# Altium PCB PCB_adjivas.PcbDoc (part 1 of 2)
Units mm, origin at the board's own origin, x right, y up, seen from the top; angles counter-clockwise.
Board outline 105 x 80 mm, 8 copper layers (Top Side (Sig 1), Ground Plane 1 (GND), Signal Layer 2, Power Plane 1 (VCC), Power Plane 2 (VCC), Signal Layer 3, Ground Plane 2 (GND), Bottom Side (Sig 4)), stack 1.607 mm thick; 259 components, 308 nets, 1263 pads, 294 vias.
Unrouted connection lines stored in the file: 787.
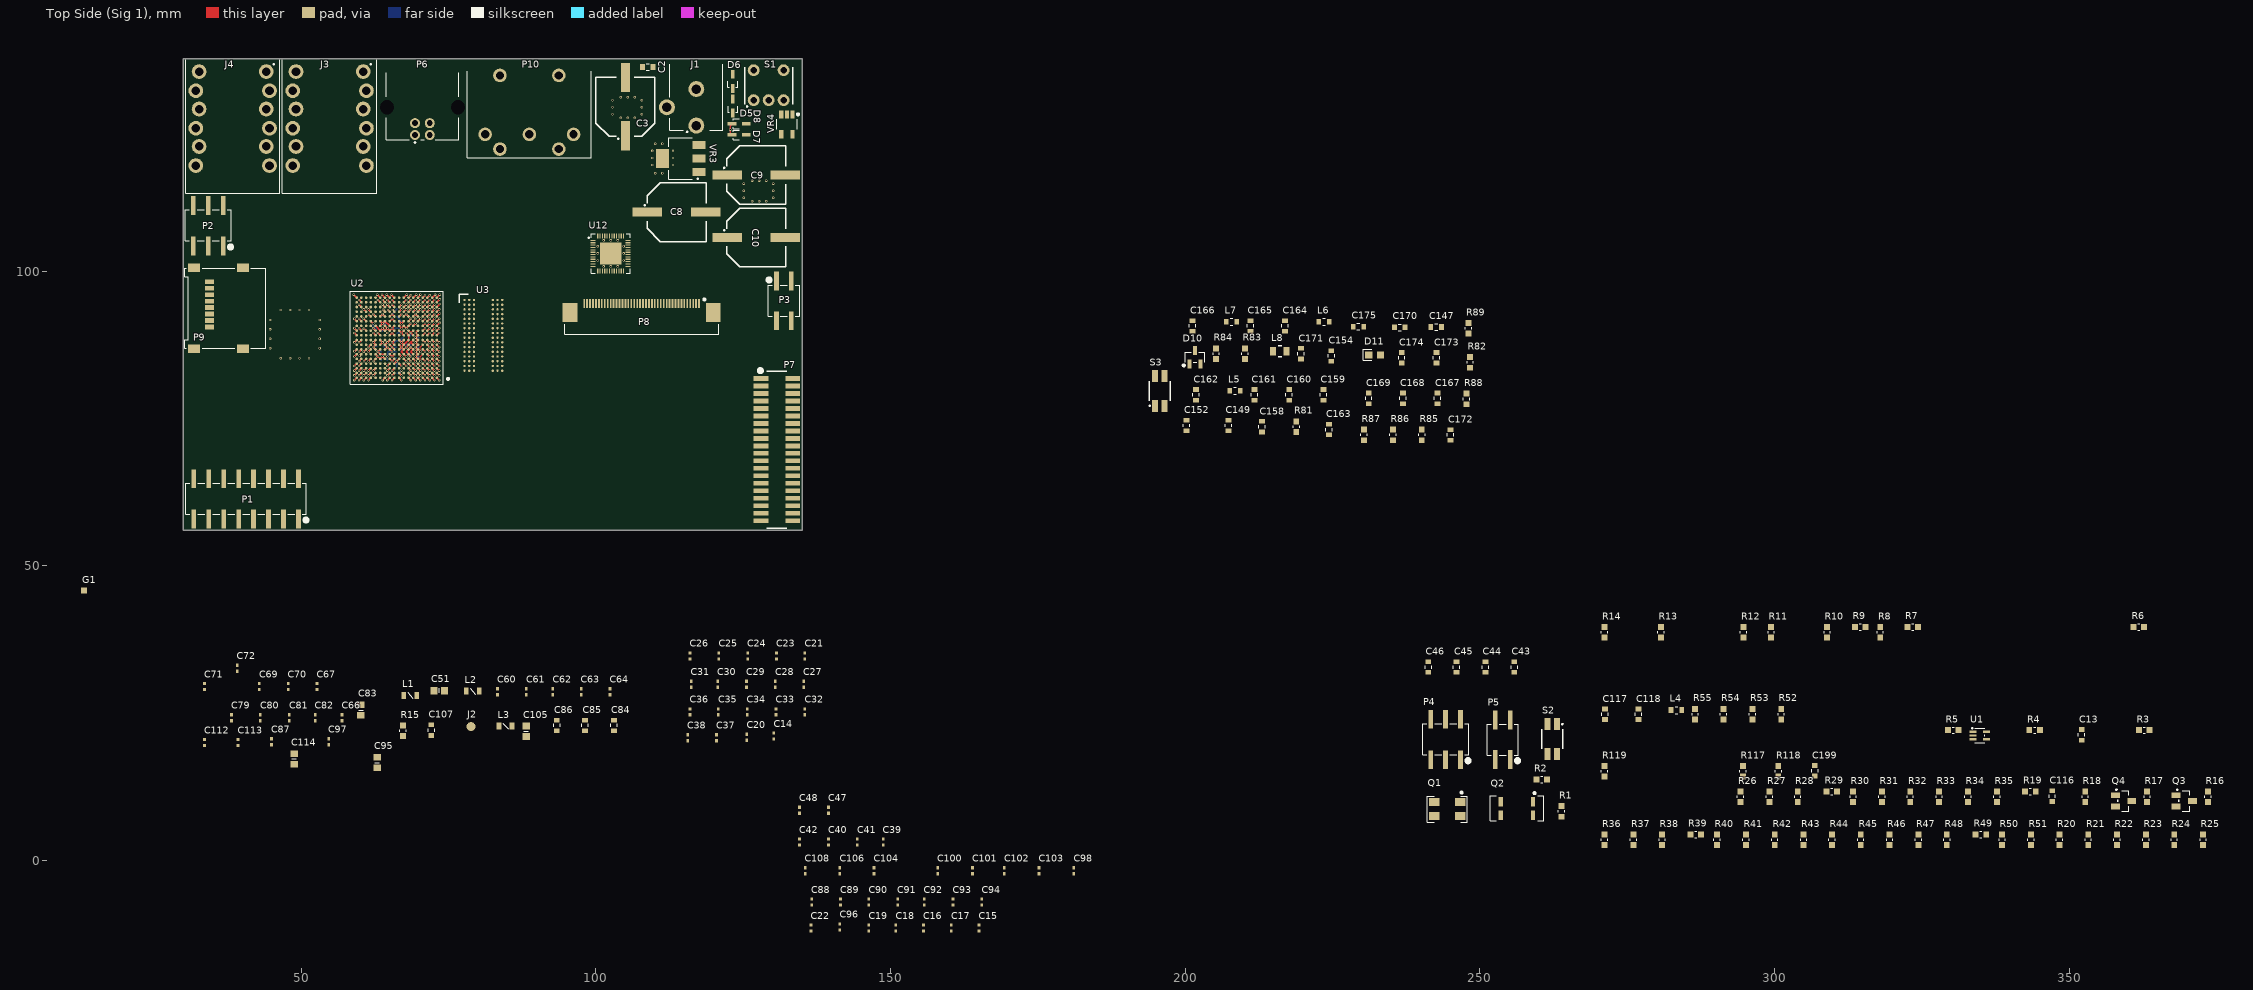
[diagram p0: Top Side (Sig 1) view]
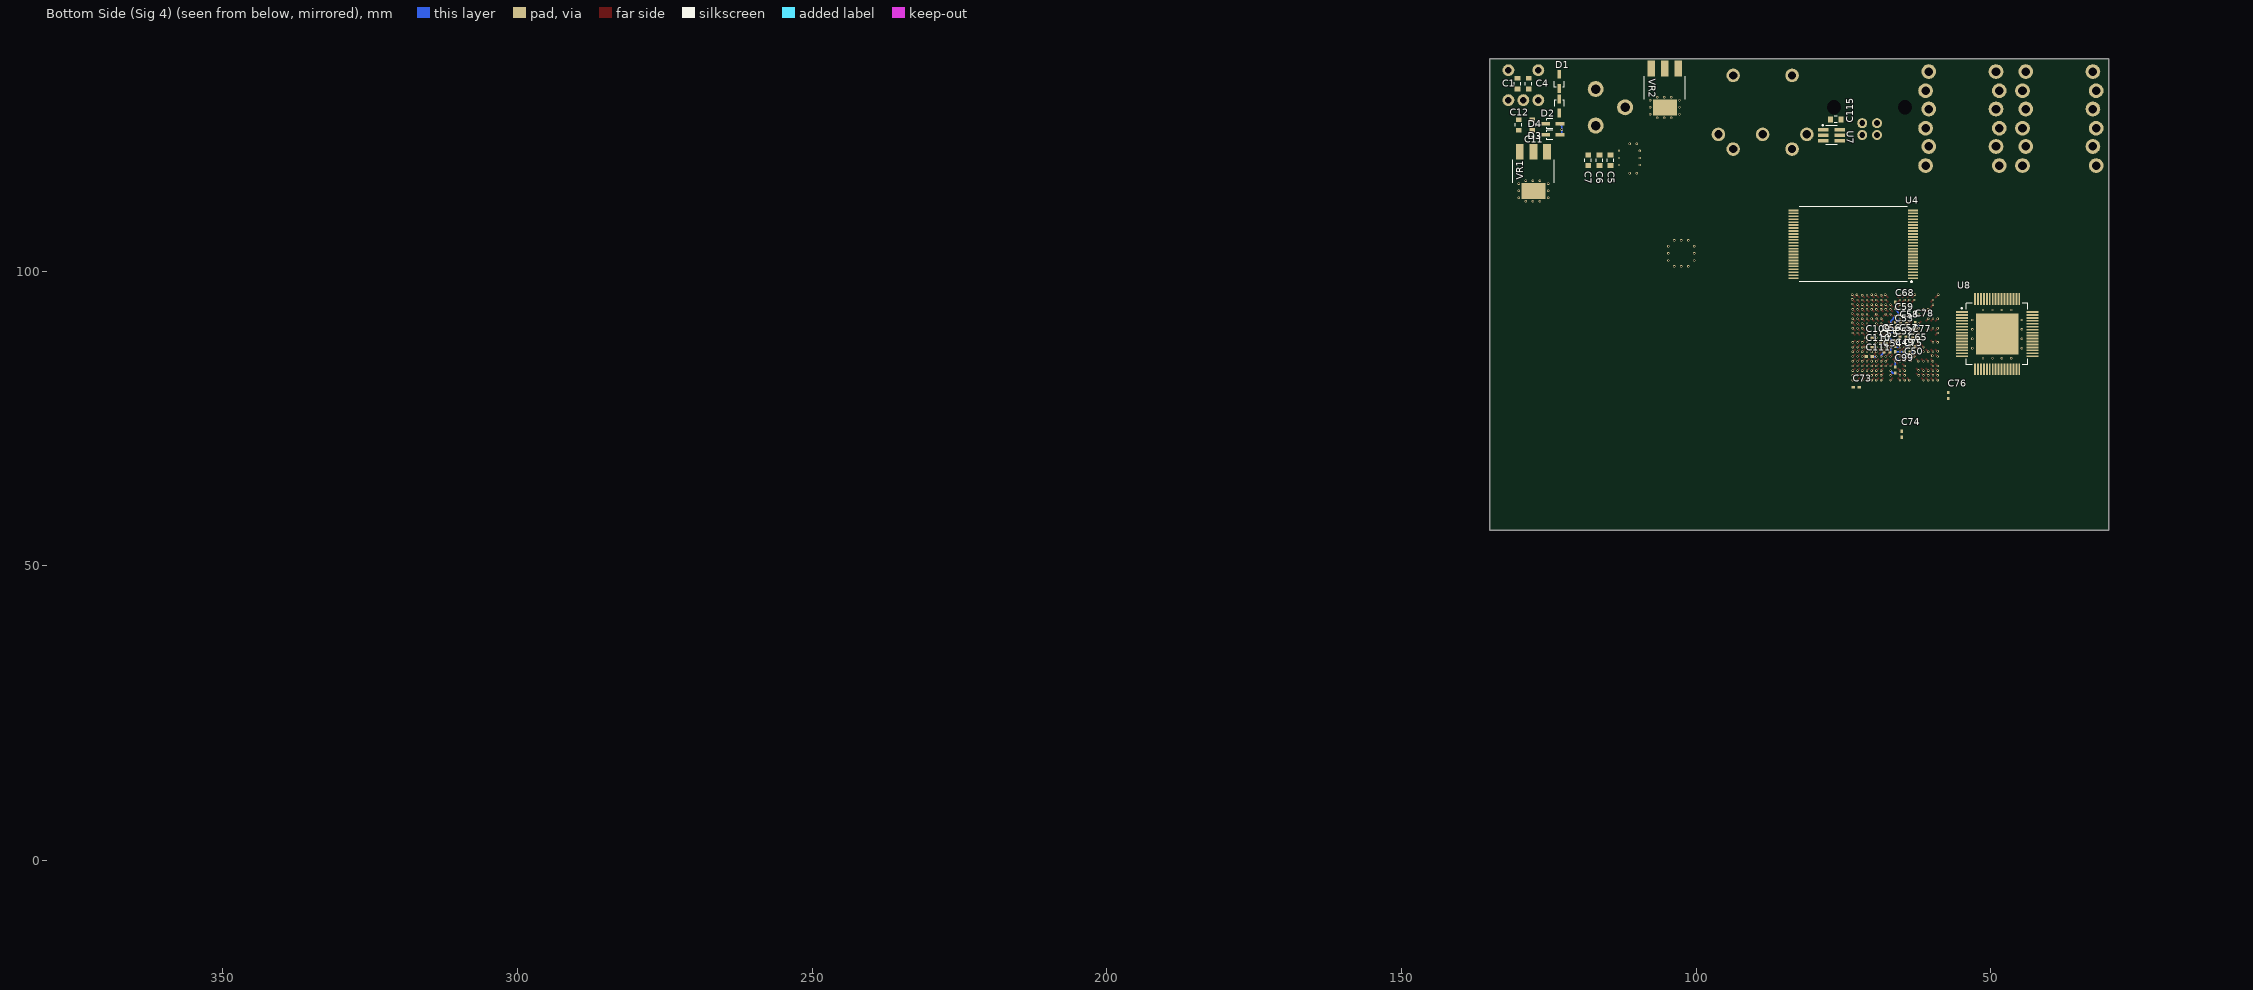
[diagram p1: Bottom Side (Sig 4) view, seen from below]
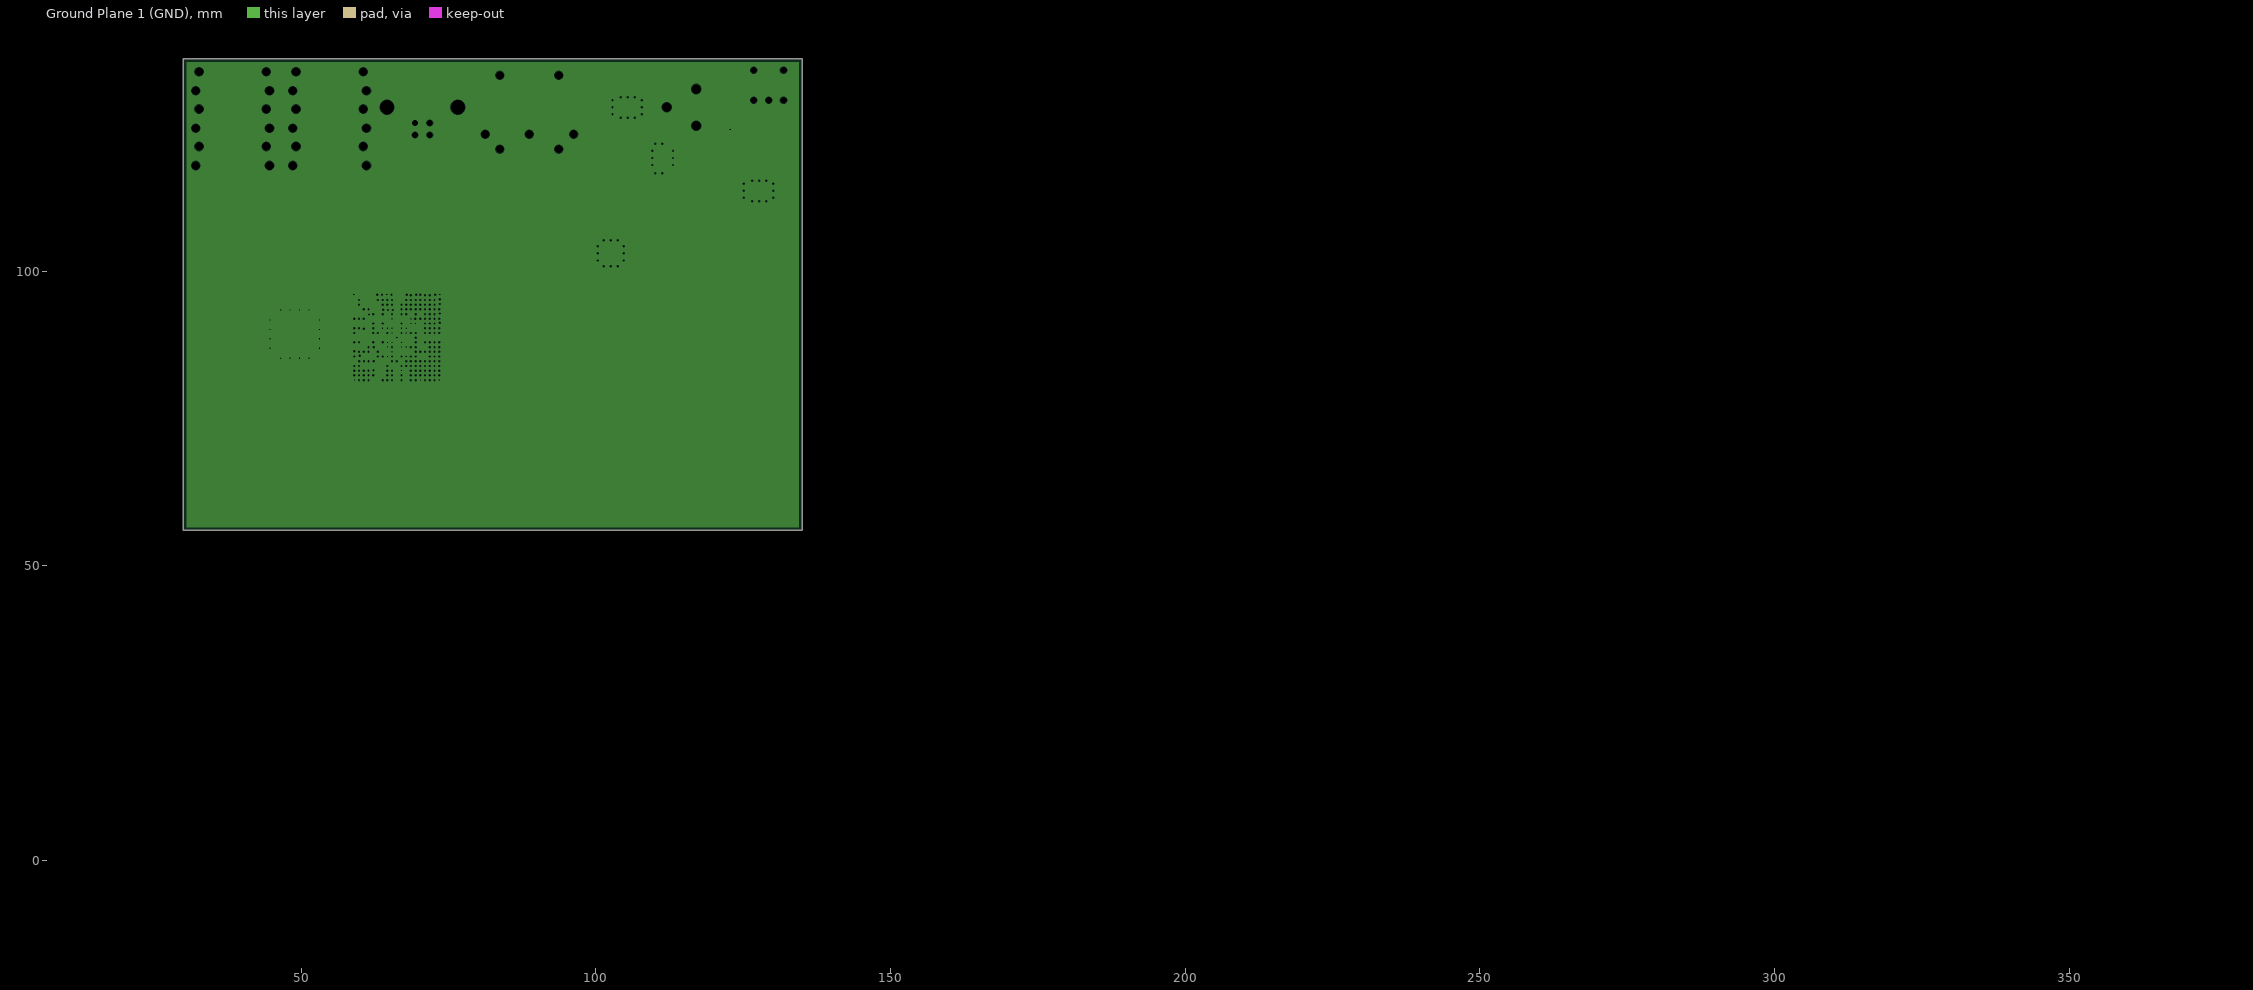
[diagram p2: Ground Plane 1 (GND), clearances drawn from the general rule]
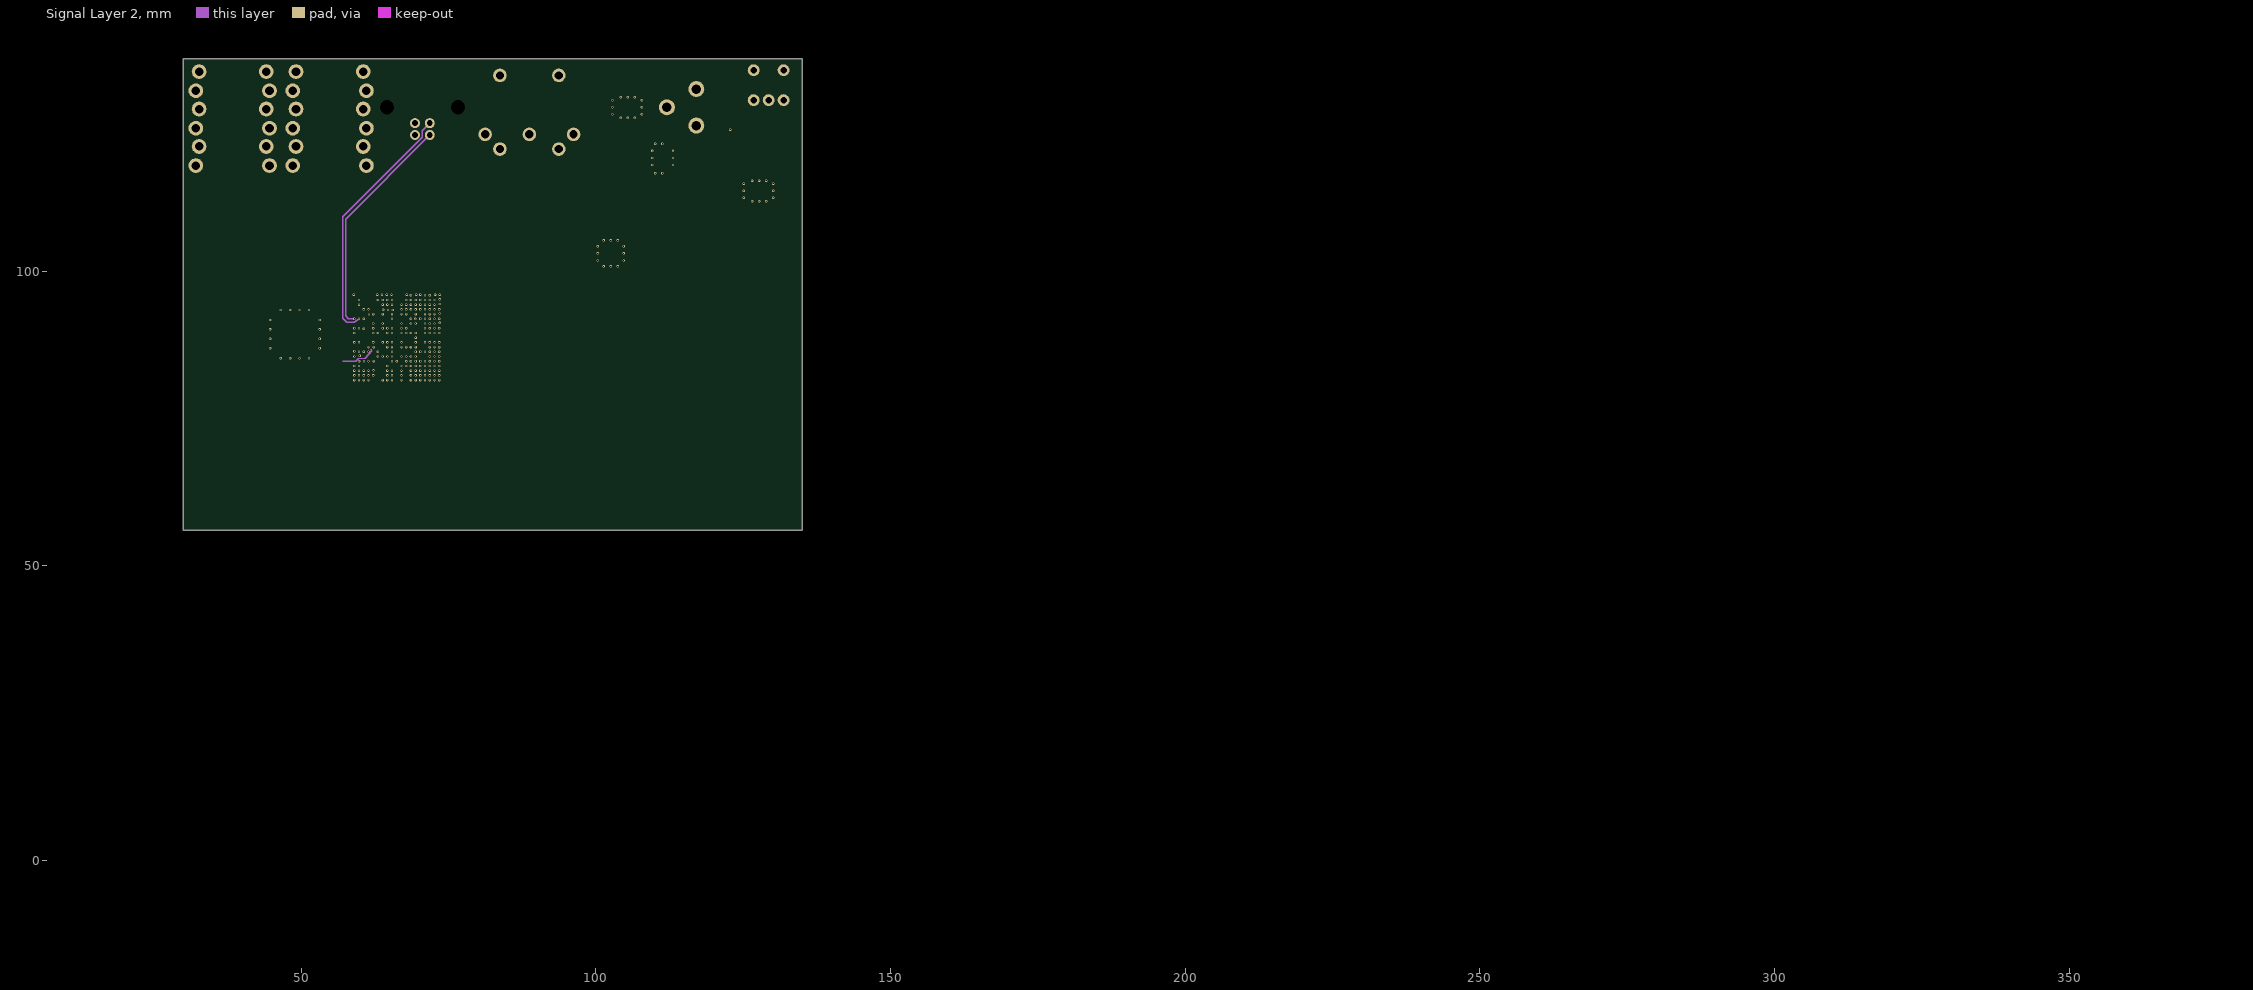
[diagram p3: Signal Layer 2]
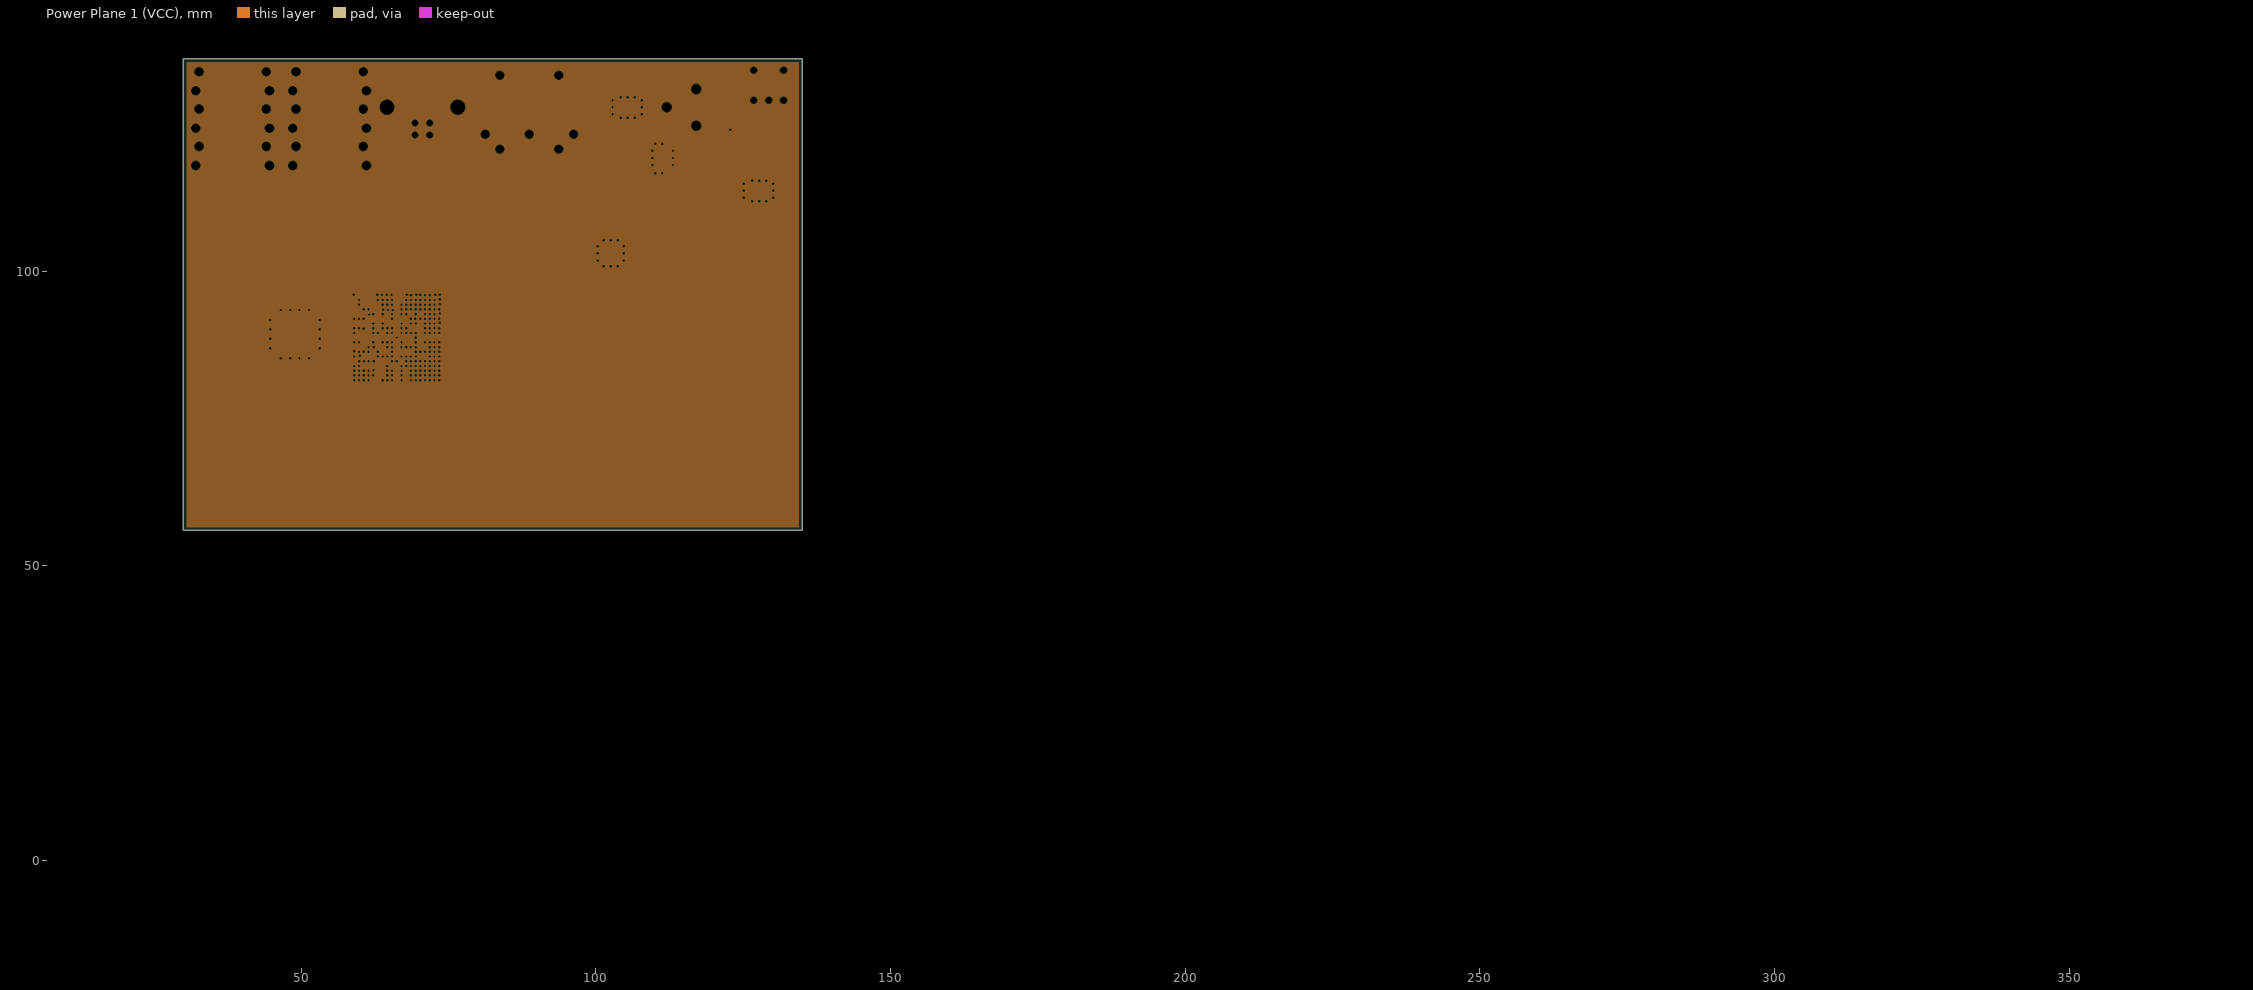
[diagram p4: Power Plane 1 (VCC), clearances drawn from the general rule]
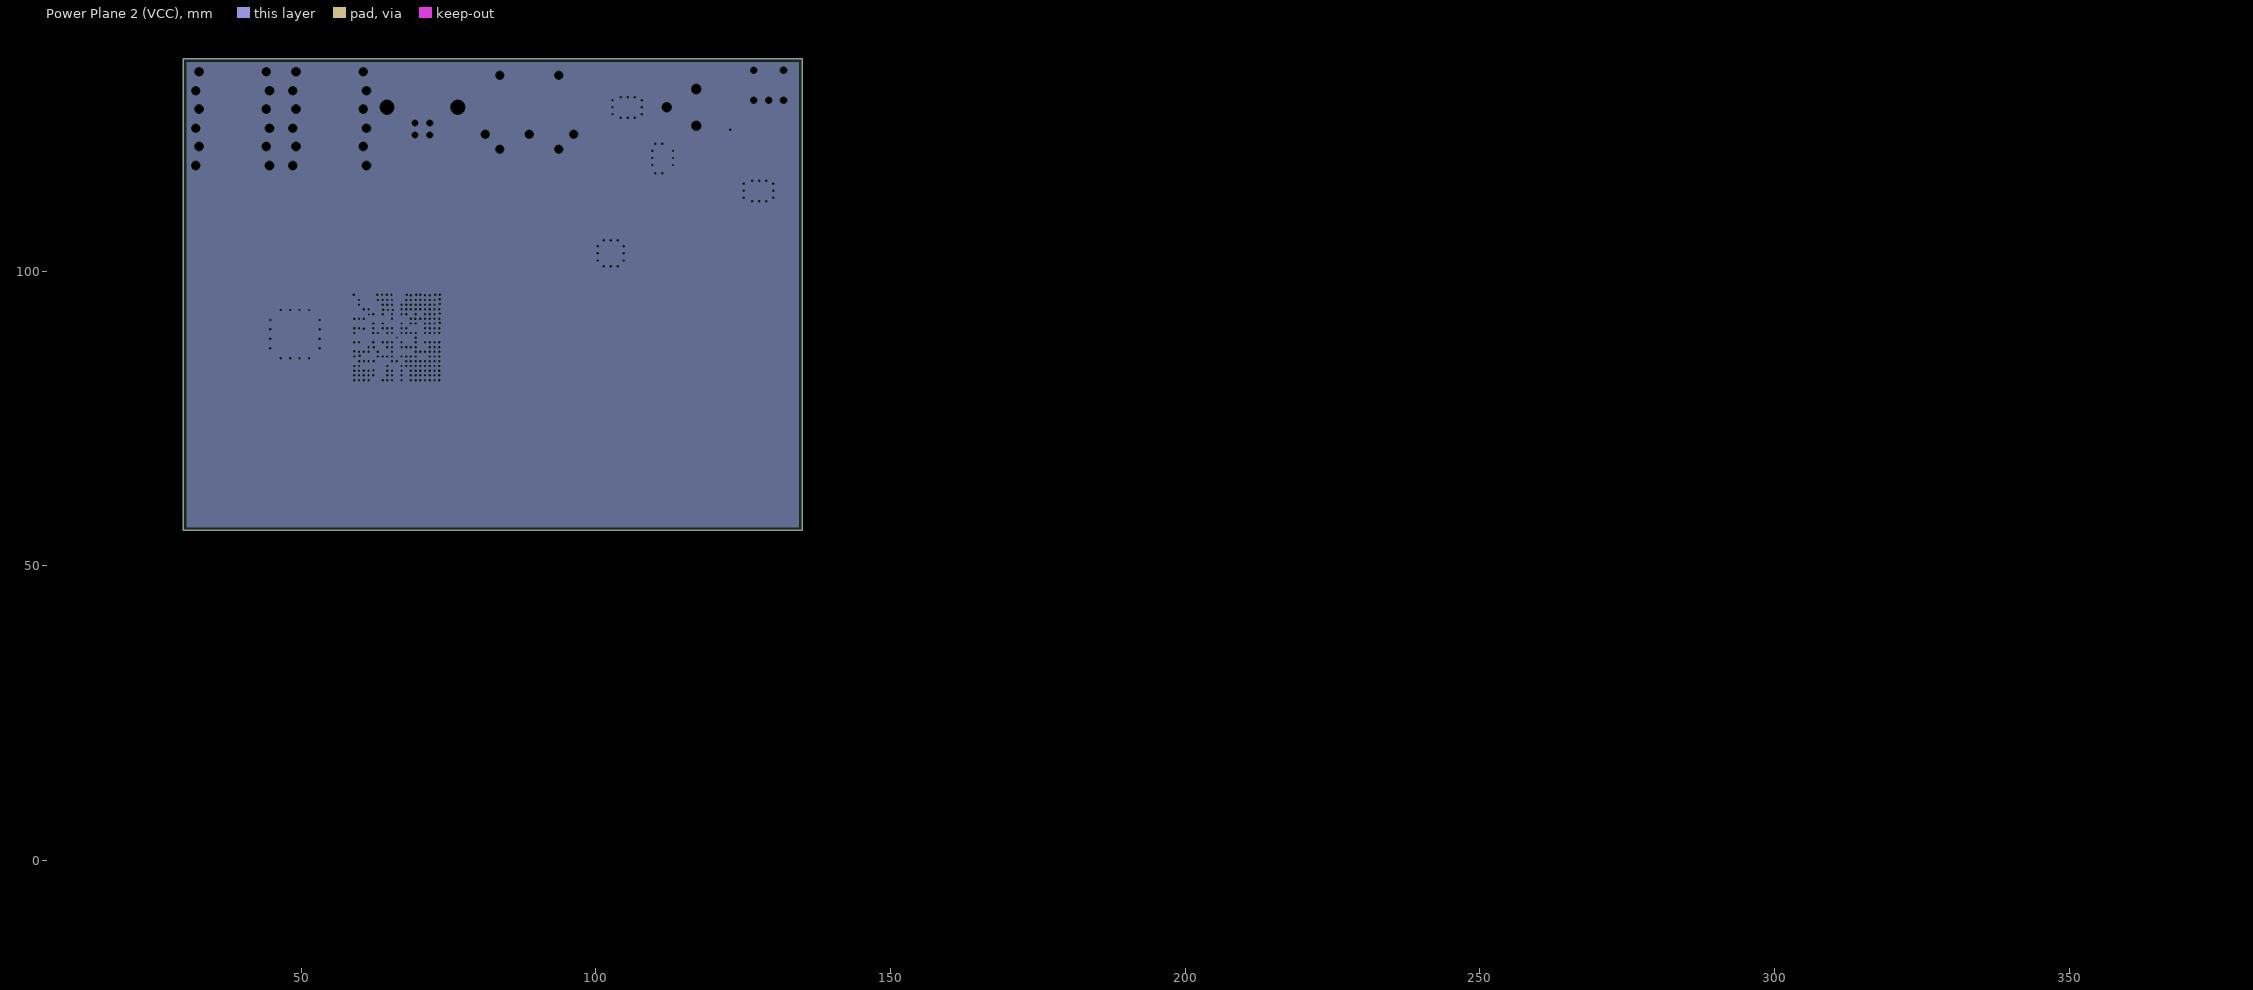
[diagram p5: Power Plane 2 (VCC), clearances drawn from the general rule]
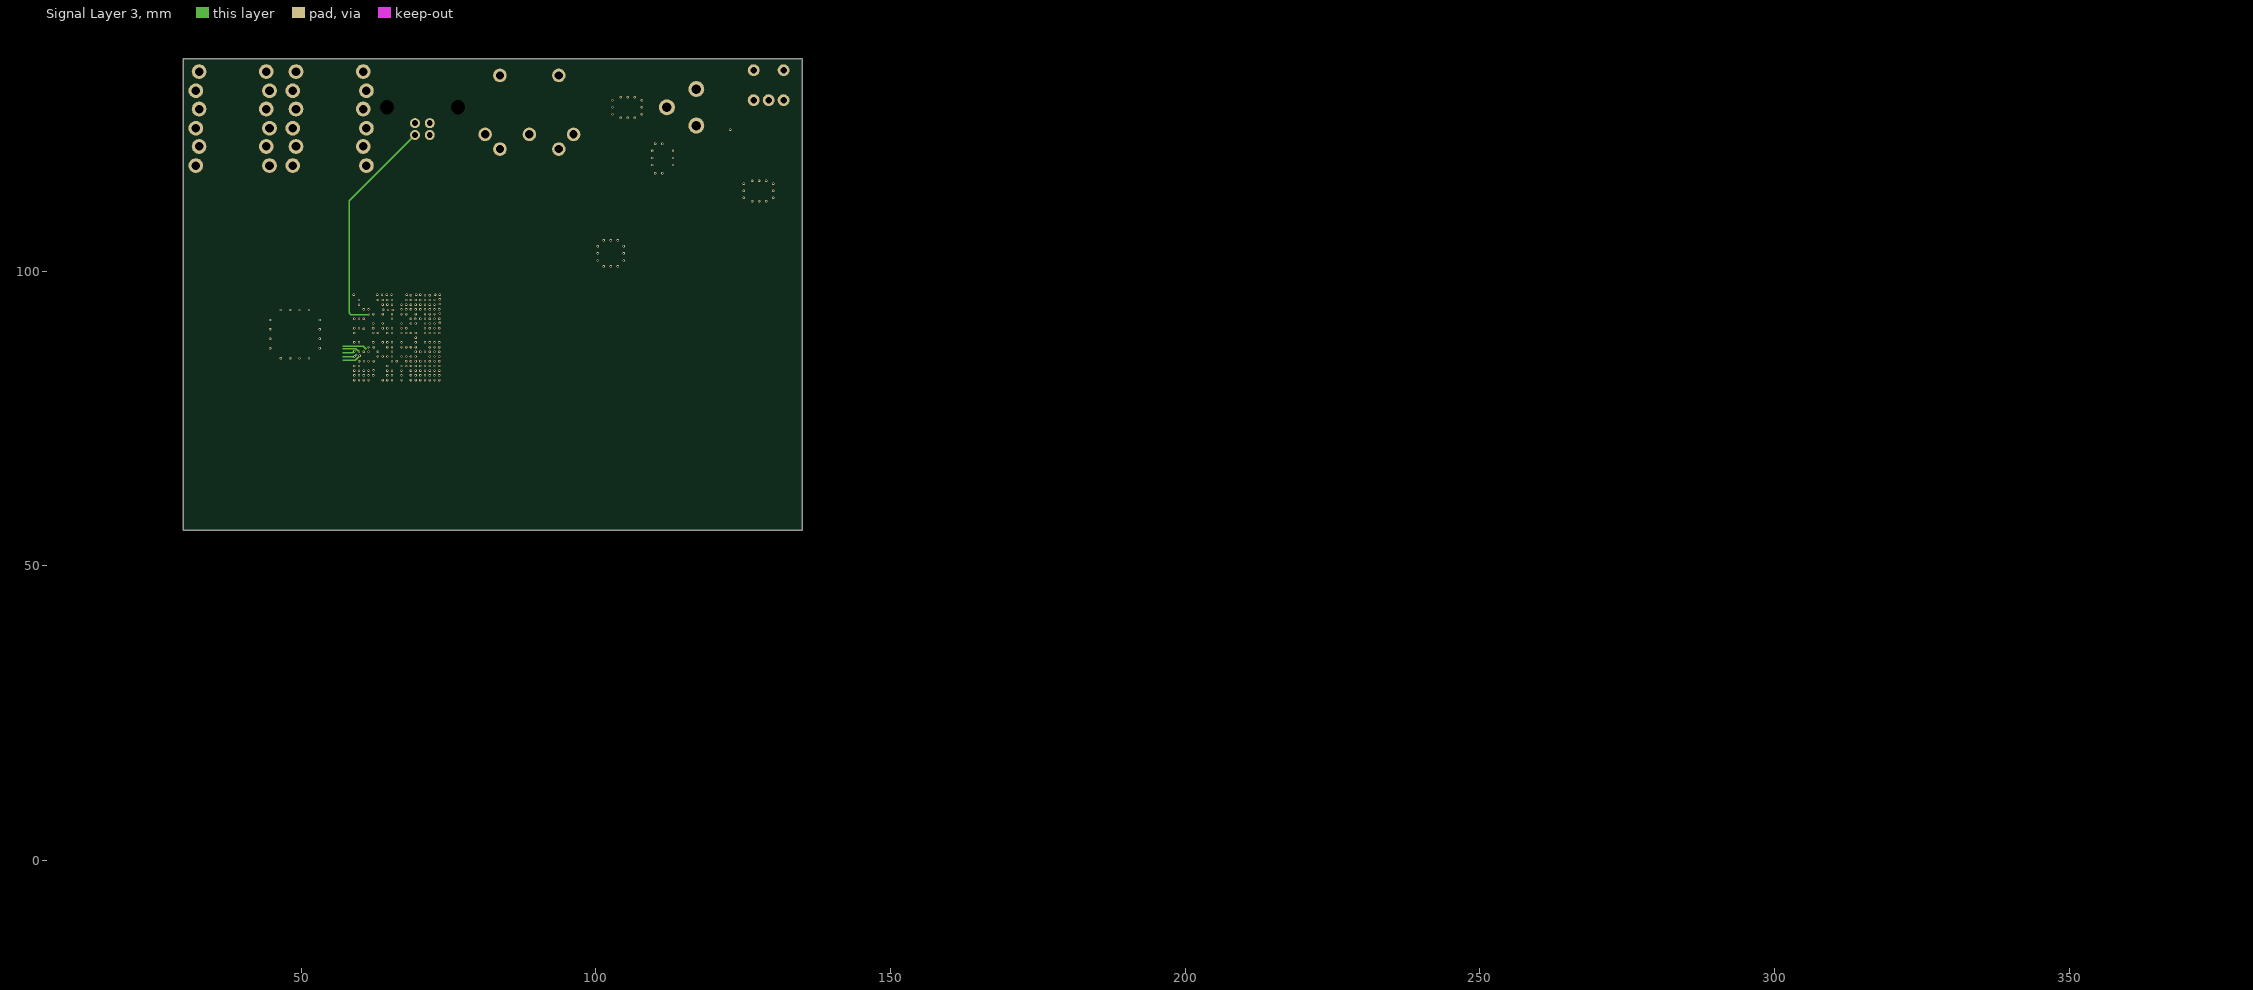
[diagram p6: Signal Layer 3]
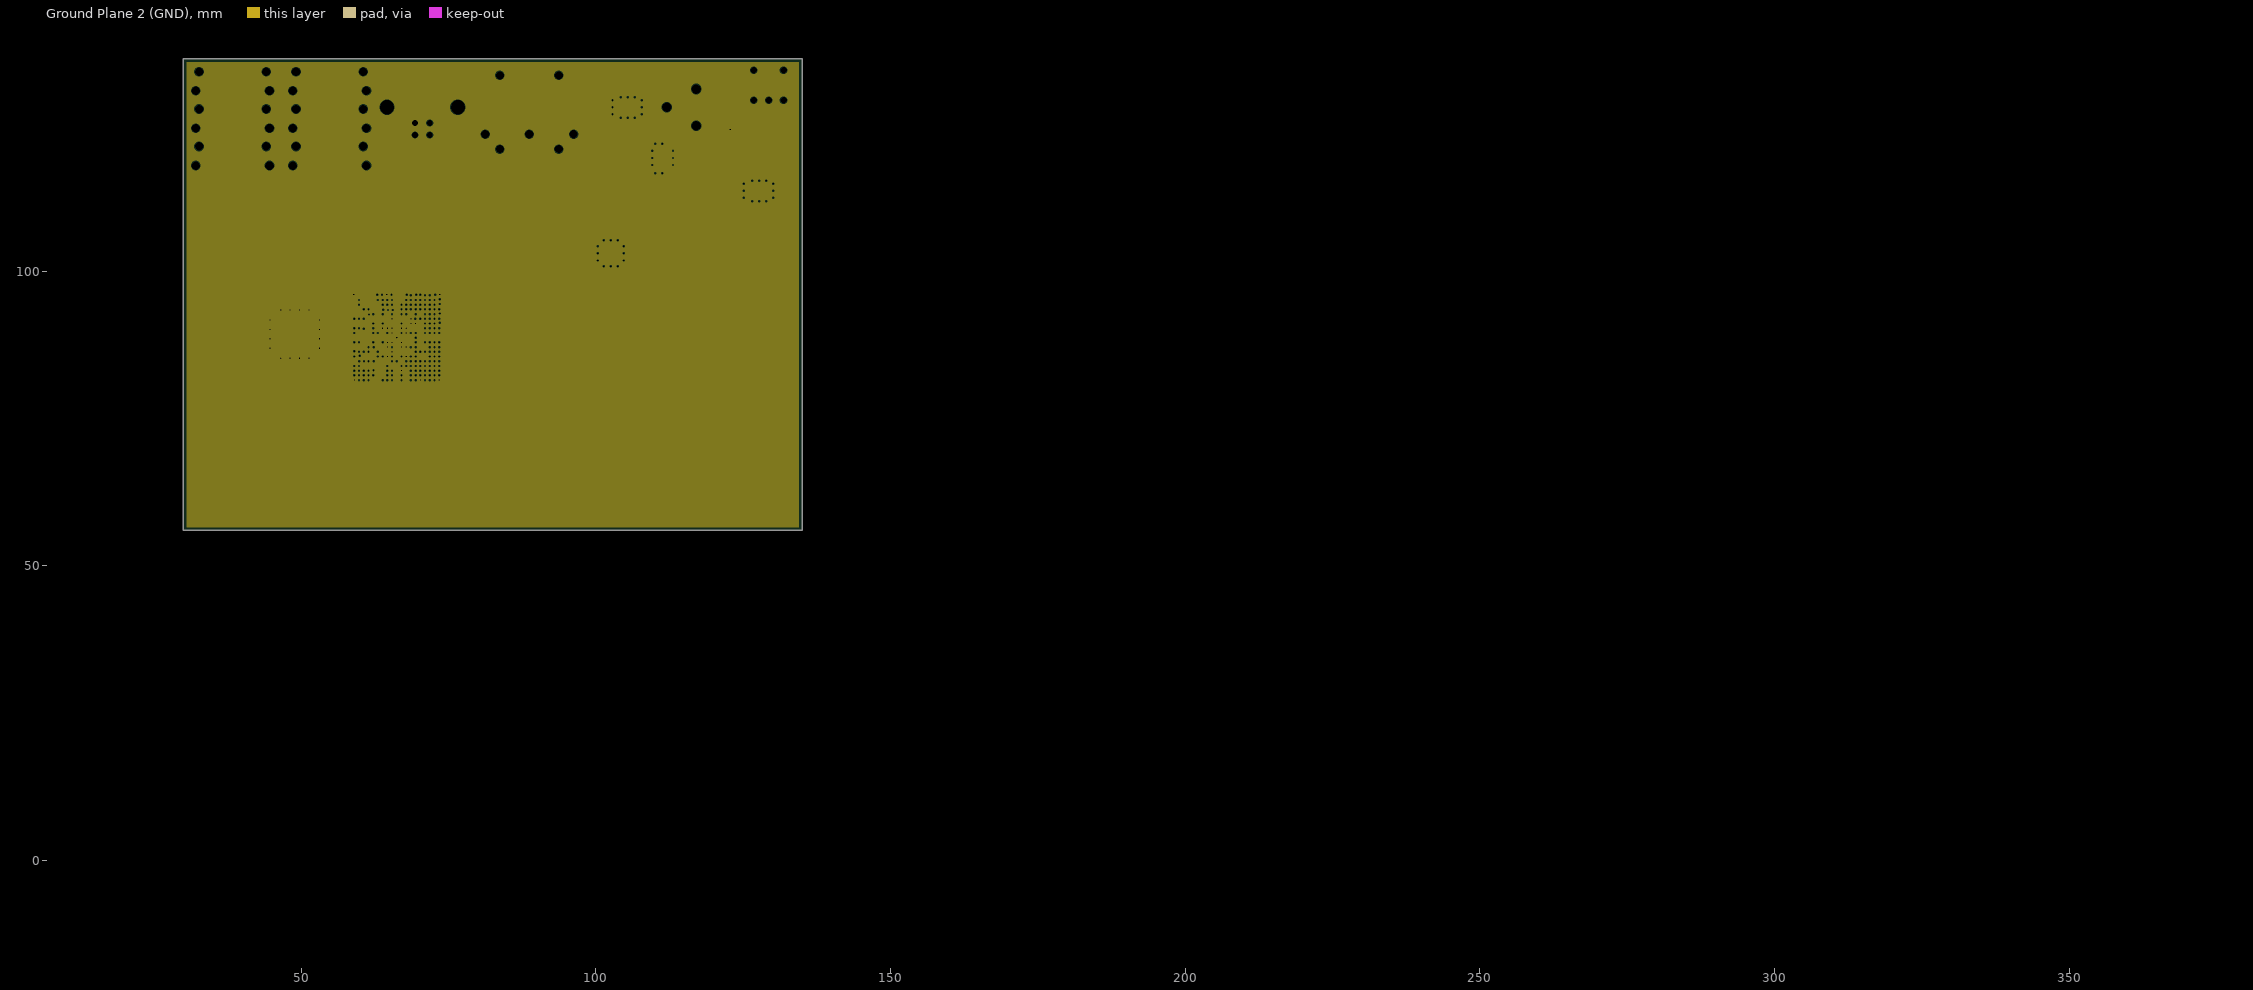
[diagram p7: Ground Plane 2 (GND), clearances drawn from the general rule]

## Layer stack, top to bottom
Top Solder: solder mask 0.0102, Solder Resist, Dk 3.7
Top Side (Sig 1): signal copper 0.035
Dielectric 1: prepreg 0.2, FR-4, Dk 4.6
Ground Plane 1 (GND): plane copper 0.035, net GND
Dielectric 2: core 0.2, FR-4, Dk 4.6
Signal Layer 2: signal copper 0.035
Dielectric 3: prepreg 0.2, FR-4, Dk 4.6
Power Plane 1 (VCC): plane copper 0.035
Dielectric 4: core 0.2, FR-4, Dk 4.6
Power Plane 2 (VCC): plane copper 0.035
Dielectric 5: prepreg 0.2, FR-4, Dk 4.6
Signal Layer 3: signal copper 0.035
Dielectric 6: core 0.2, FR-4, Dk 4.6
Ground Plane 2 (GND): plane copper 0.035, net GND
Dielectric 7: prepreg 0.127, FR-4, Dk 4.2
Bottom Side (Sig 4): signal copper 0.035
Bottom Solder: solder mask 0.0102, Solder Resist, Dk 3.7

## Board outline
30,56 30,136 135,136 135,56

## Design rules (kind name [scope] priority, off if disabled: settings)
Clearance [All] p1: gap=0.1
Height [All] p1: minheight=0 maxheight=50 prefheight=12.7
HoleSize [All] p1: absolutevalues=TRUE maxlimit=10 minlimit=0.2 maxpercent=80.000 minpercent=20.000
HoleToHoleClearance [All] p1: gap=0.25 allowstackedmicrovias=TRUE
MinimumSolderMaskSliver [All] p1: minsoldermaskwidth=0.1
PlaneClearance [All] p1: clearance=0.1
PlaneConnect [All] p1: planeconnectstyle=Relief reliefexpansion=0.1 reliefentries=4 reliefconductorwidth=0.1 reliefairgap=0.1
PolygonConnect [All] p1: connectstyle=Relief reliefconductorwidth=0.1 reliefentries=4 polygonreliefangle="90 Angle" airgapwidth=0.1
RoutingVias [All] p1: holewidth=0.2 width=0.4 viastyle="Through Hole" minholewidth=0.2 minwidth=0.4 maxholewidth=10 maxwidth=11
ShortCircuit "GND-AGND Connection" [InNet('GND') vs InNet('AGND')] p1: allowed=TRUE
SilkToSilkClearance SilkToSilkClearance_1 [OnLayer('Top Overlay') vs OnLayer('Top Overlay')] p1: silktosilkclearance=0
SilkToSilkClearance [All] p2: silktosilkclearance=0
SilkToSolderMaskClearance [IsPad] p1: minsilkscreentomaskgap=0.15 clearancetoexposedcopper=TRUE
SolderMaskExpansion [All] p1: expansion=0.05
UnpouredPolygon [All] p1: allowunpoured=FALSE
Width [All] p1: maxlimit=10 minlimit=0.1 preferedwidth=0.25
20 further rules are at their usual default settings.

## Classes and differential pairs
component class Alimentation: C1 C2 C3 C4 C5 C6 C7 C8 C9 C10 C11 C12 D1 D2 D3 D4 D5 D6 D7 D8 G1 J1 S1 VR1 VR2 VR3 VR4
channel class PC2_Input: E V X Z
net class LCD_R[0..7]: LCD_R0 LCD_R1 LCD_R2 LCD_R3 LCD_R4 LCD_R5 LCD_R6 LCD_R7
net class LCD_G[0..7]: LCD_G0 LCD_G1 LCD_G2 LCD_G3 LCD_G4 LCD_G5 LCD_G6 LCD_G7
net class LCD_B[0..7]: LCD_B0 LCD_B1 LCD_B2 LCD_B3 LCD_B4 LCD_B5 LCD_B6 LCD_B7
component class USB: C115 P6 U7
component class PMIC: C158 C159 C160 C161 C162 C163 C164 C165 C166 C167 C168 C169 C170 C171 C172 C173 C174 C175 D10 D11 L5 L6 L7 L8 R81 R82 R83 R84 R85 R86 R87 R88 R89 S3 U12
component class "Part C (Alim)": C49 C50 C51 C52 C53 C54 C55 C56 C57 C58 C59 C60 C61 C62 C63 C64 C65 C66 C67 C68 C69 C70 C71 C72 C73 C74 C75 C76 C77 C78 C79 C80 C81 C82 C83 C84 C85 C86 C87 C88 C89 C90 C91 C92 C93 C94 C95 C96 C97 C98 C99 C100 C101 C102 C103 C104 C105 C106 C107 C108 C109 C110 C111 C112 C113 C114 J2 L1 L2 L3 R15
component class "Part B": C43 C44 C45 C46 C47 C48 P5
component class "Part A": C13 C14 C15 C16 C17 C18 C19 C20 C21 C22 C23 C24 C25 C26 C27 C28 C29 C30 C31 C32 C33 C34 C35 C36 C37 C38 C39 C40 C41 C42 P4 Q1 Q2 R3 R4 R5 R6 R7 R8 R9 R10 R11 R12 R13 R14 R321 R322 R323 S2 U1 U2 U3 U4
component class MMC: C117 C118 L4 P9 R52 R53 R54 R55
component class "MIDI IN": P10
component class LCD: C116 P7 P8 Q3 Q4 R16 R17 R18 R19 R20 R21 R22 R23 R24 R25 R26 R27 R28 R29 R30 R31 R32 R33 R34 R35 R36 R37 R38 R39 R40 R41 R42 R43 R44 R45 R46 R47 R48 R49 R50 R51
component class "Codec Audio": U8
component class J: C147 C149 C152 C154
component class "Audio IN": J3 "U20_Audio IN"
component class "Audio OUT": C199 J4 R117 R118 R119 "U20_Audio OUT"
component class P0_Main_Connect: P1 P2 P3 R1 R2

## Components (designator, comment, footprint, x,y, rotation, side; value= is the part's Value field where it differs from the comment)
C1 "10uF" CAPC1608X08 130.3,131.8 r270 bottom
C2 "22uF" CAPC1608X08 108.8,134.6 r0 top
C3 "470uF" CAPC100100X102 105,127.9 r90 top
C4 "10uF" CAPC1608X08 128.4,131.8 r270 bottom
C5 "22uF" CAPC1608X08 114.5,118.8 r270 bottom
C6 "0.47uF" CAPC1608X08 116.4,118.8 r270 bottom
C7 "22uF" CAPC1608X08 118.3,118.8 r90 bottom
C8 "470uF" CAPC100100X102 113.7,110 r0 top
C9 "470uF" CAPC100100X102 127.2,116.3 r0 top
C10 "470uF" CAPC100100X102 127.2,105.7 r0 top
C11 "1uF" CAPC1608X08 127.8,124.8 r270 bottom
C12 "22uF" CAPC1608X08 130.1,124.8 r90 bottom
C13 "1uF" CAPC1608X08 352.156,21.291 r90 top
C14 "100nF" "CAPC1005X05 (0402)" 130.2,21.1 r270 top
C15 "18pF" "CAPC1005X05 (0402)" 165,-11.492 r90 top
C16 "100nF" "CAPC1005X05 (0402)" 155.6,-11.492 r90 top
C17 "100nF" "CAPC1005X05 (0402)" 160.3,-11.492 r90 top
C18 "18pF" "CAPC1005X05 (0402)" 150.9,-11.492 r90 top
C19 "12pF" "CAPC1005X05 (0402)" 146.3,-11.492 r90 top
C20 "100nF" "CAPC1005X05 (0402)" 125.6,20.9 r90 top
C21 "100nF" "CAPC1005X05 (0402)" 135.456,34.691 r90 top
C22 "12pF" "CAPC1005X05 (0402)" 136.5,-11.492 r90 top
C23 "100nF" "CAPC1005X05 (0402)" 130.656,34.691 r90 top
C24 "100nF" "CAPC1005X05 (0402)" 125.756,34.691 r90 top
C25 "100nF" "CAPC1005X05 (0402)" 120.856,34.691 r90 top
C26 "100nF" "CAPC1005X05 (0402)" 115.956,34.691 r90 top
C27 "100nF" "CAPC1005X05 (0402)" 135.257,29.891 r90 top
C28 "100nF" "CAPC1005X05 (0402)" 130.457,29.891 r90 top
C29 "100nF" "CAPC1005X05 (0402)" 125.557,29.891 r90 top
C30 "100nF" "CAPC1005X05 (0402)" 120.657,29.891 r90 top
C31 "100nF" "CAPC1005X05 (0402)" 116.157,29.891 r90 top
C32 "100nF" "CAPC1005X05 (0402)" 135.457,25.191 r90 top
C33 "100nF" "CAPC1005X05 (0402)" 130.557,25.191 r90 top
C34 "100nF" "CAPC1005X05 (0402)" 125.657,25.191 r90 top
C35 "100nF" "CAPC1005X05 (0402)" 120.757,25.191 r90 top
C36 "100nF" "CAPC1005X05 (0402)" 115.957,25.191 r90 top
C37 "100nF" "CAPC1005X05 (0402)" 120.457,20.791 r90 top
C38 "100nF" "CAPC1005X05 (0402)" 115.557,20.791 r90 top
C39 "100nF" "CAPC1005X05 (0402)" 148.757,3.091 r90 top
C40 "100nF" "CAPC1005X05 (0402)" 139.457,3.091 r90 top
C41 "100nF" "CAPC1005X05 (0402)" 144.357,3.091 r90 top
C42 "100nF" "CAPC1005X05 (0402)" 134.557,3.091 r90 top
C43 "1nF" CAPC1608X08 255.857,32.79 r90 top
C44 "1nF" CAPC1608X08 250.957,32.79 r90 top
C45 "1nF" CAPC1608X08 246.057,32.79 r90 top
C46 "1nF" CAPC1608X08 241.257,32.79 r90 top
C47 "10nF" "CAPC1005X05 (0402)" 139.457,8.491 r90 top
C48 "100nF" "CAPC1005X05 (0402)" 134.557,8.491 r90 top
C49 "100nF" "CAPC1005X05 (0402)" 66.2,85.792 r270 bottom
C50 "100nF" "CAPC1005X05 (0402)" 64.1,84.8 r180 bottom
C51 "22uF/6.3V" "0805 (2012 metric)" 73.4,28.8 r0 top
C52 "100nF" "CAPC1005X05 (0402)" 66.2,87.7 r270 bottom
C53 "100nF" "CAPC1005X05 (0402)" 66.2,89.908 r270 bottom
C54 "100nF" "CAPC1005X05 (0402)" 67.608,86.2 r0 bottom
C55 "100nF" "CAPC1005X05 (0402)" 68.208,87.8 r0 bottom
C56 "100nF" "CAPC1005X05 (0402)" 67.8,88.8 r0 bottom
C57 "100nF" "CAPC1005X05 (0402)" 64.9,88.8 r180 bottom
C58 "100nF" "CAPC1005X05 (0402)" 64.8,91.1 r180 bottom
C59 "100nF" "CAPC1005X05 (0402)" 66.2,91.8 r90 bottom
C60 "100nF" "CAPC1005X05 (0402)" 83.3,28.608 r90 top
C61 "100nF" "CAPC1005X05 (0402)" 88.2,28.608 r90 top
C62 "100nF" "CAPC1005X05 (0402)" 92.7,28.608 r90 top
C63 "100nF" "CAPC1005X05 (0402)" 97.5,28.608 r90 top
C64 "100nF" "CAPC1005X05 (0402)" 102.4,28.608 r90 top
C65 "100nF" "CAPC1005X05 (0402)" 63.4,87.2 r180 bottom
C66 "100nF" "CAPC1005X05 (0402)" 56.9,24.2 r90 top
C67 "100nF" "CAPC1005X05 (0402)" 52.656,29.491 r90 top
C68 "100nF" "CAPC1005X05 (0402)" 66.2,94.2 r270 bottom
C69 "100nF" "CAPC1005X05 (0402)" 42.856,29.491 r90 top
C70 "100nF" "CAPC1005X05 (0402)" 47.756,29.491 r90 top
C71 "100nF" "CAPC1005X05 (0402)" 33.556,29.491 r90 top
C72 "100nF" "CAPC1005X05 (0402)" 39.1,32.608 r90 top
C73 "100nF" "CAPC1005X05 (0402)" 72.8,80.3 r180 bottom
C74 "100nF" "CAPC1005X05 (0402)" 65.1,72.3 r270 bottom
C75 "100nF" "CAPC1005X05 (0402)" 64.2,86.3 r180 bottom
C76 "100nF" "CAPC1005X05 (0402)" 57.2,78.9 r90 bottom
C77 "100nF" "CAPC1005X05 (0402)" 62.7,88.7 r0 bottom
C78 "100nF" "CAPC1005X05 (0402)" 62.8,90.708 r270 bottom
C79 "100nF" "CAPC1005X05 (0402)" 38.156,24.191 r90 top
C80 "100nF" "CAPC1005X05 (0402)" 43.056,24.191 r90 top
C81 "100nF" "CAPC1005X05 (0402)" 47.956,24.191 r90 top
C82 "100nF" "CAPC1005X05 (0402)" 52.356,24.191 r90 top
C83 "22uF/6.3V" "0805 (2012 metric)" 60.1,25.5 r90 top
C84 "1uF" CAPC1608X08 103.056,22.89 r90 top
C85 "1uF" CAPC1608X08 98.156,22.89 r90 top
C86 "1uF" CAPC1608X08 93.356,22.89 r90 top
C87 "100nF" "CAPC1005X05 (0402)" 44.944,20.109 r270 top
C88 "100nF" "CAPC1005X05 (0402)" 136.6,-7.092 r90 top
C89 "100nF" "CAPC1005X05 (0402)" 141.5,-7.092 r90 top
C90 "100nF" "CAPC1005X05 (0402)" 146.3,-7.092 r90 top
C91 "100nF" "CAPC1005X05 (0402)" 151.2,-7.092 r90 top
C92 "100nF" "CAPC1005X05 (0402)" 155.7,-7.092 r90 top
C93 "100nF" "CAPC1005X05 (0402)" 160.6,-7.092 r90 top
C94 "100nF" "CAPC1005X05 (0402)" 165.5,-7.092 r90 top
C95 "22uF/6.3V" "0805 (2012 metric)" 62.856,16.59 r90 top
C96 "100nF" "CAPC1005X05 (0402)" 141.4,-11.3 r90 top
C97 "100nF" "CAPC1005X05 (0402)" 54.644,20.109 r270 top
C98 "100nF" "CAPC1005X05 (0402)" 181.1,-1.792 r90 top
C99 "100nF" "CAPC1005X05 (0402)" 66.2,83.2 r90 bottom
C100 "100nF" "CAPC1005X05 (0402)" 158,-1.792 r90 top
C101 "100nF" "CAPC1005X05 (0402)" 163.9,-1.792 r90 top
C102 "100nF" "CAPC1005X05 (0402)" 169.3,-1.792 r90 top
C103 "100nF" "CAPC1005X05 (0402)" 175.2,-1.792 r90 top
C104 "100nF" "CAPC1005X05 (0402)" 147.2,-1.792 r90 top
C105 "22uF/6.3V" "0805 (2012 metric)" 88.157,21.89 r90 top
C106 "10nF" "CAPC1005X05 (0402)" 141.4,-1.792 r90 top
C107 "1uF" CAPC1608X08 72.057,22.09 r90 top
C108 "10nF" "CAPC1005X05 (0402)" 135.5,-1.792 r90 top
C109 "100nF" "CAPC1005X05 (0402)" 70.6,88.7 r180 bottom
C110 "100nF" "CAPC1005X05 (0402)" 70.6,87.1 r180 bottom
C111 "100nF" "CAPC1005X05 (0402)" 70.608,85.5 r180 bottom
C112 "100nF" "CAPC1005X05 (0402)" 33.557,19.991 r90 top
C113 "100nF" "CAPC1005X05 (0402)" 39.257,19.991 r90 top
C114 "22uF/6.3V" "0805 (2012 metric)" 48.8,17.2 r90 top
C115 "0.1uF" CAPC1608X08 76.3,125.7 r0 bottom
C116 "Cap" CAPC1608X08 347.156,10.891 r90 top
C117 "Cap" CAPC1608X08 271.257,24.791 r90 top
C118 "Cap" CAPC1608X08 276.957,24.791 r90 top
C147 "10uF" CAPC1608X08 242.6,90.5 r180 top
C149 "10uF" CAPC1608X08 207.357,73.791 r90 top
C152 "10uF" CAPC1608X08 200.257,73.791 r90 top
C154 "10uF" CAPC1608X08 224.8,85.6 r90 top
C158 "Cap" CAPC1608X08 213.056,73.59 r90 top
C159 "Cap" CAPC1608X08 223.456,78.99 r90 top
C160 "Cap" CAPC1608X08 217.656,78.99 r90 top
C161 "Cap" CAPC1608X08 211.756,78.99 r90 top
C162 "Cap" CAPC1608X08 201.856,78.99 r90 top
C163 "Cap" CAPC1608X08 224.4,73.1 r90 top
C164 "Cap" CAPC1608X08 216.956,90.69 r90 top
C165 "Cap" CAPC1608X08 211.056,90.69 r90 top
C166 "Cap" CAPC1608X08 201.256,90.69 r90 top
C167 "Cap" CAPC1608X08 242.856,78.39 r90 top
C168 "Cap" CAPC1608X08 236.956,78.39 r90 top
C169 "Cap" CAPC1608X08 231.156,78.39 r90 top
C170 "Cap" CAPC1608X08 236.41,90.456 r180 top
C171 "Cap" CAPC1608X08 219.656,85.99 r90 top
C172 "Cap" CAPC1608X08 245.057,72.19 r90 top
C173 "Cap" CAPC1608X08 242.657,85.29 r90 top
C174 "Cap" CAPC1608X08 236.757,85.29 r90 top
C175 "Cap" CAPC1608X08 229.41,90.557 r180 top
C199 "22uF" CAPC1608X08 306.856,15.191 r90 top
D1 "1N4148WS-7" SOD323-M 123.2,132.2 r90 bottom
D2 "1N4148WS-7" SOD323-M 123.2,128 r270 bottom
D3 "1N4148WS-7" SOD323-M 124.3,123.1 r180 bottom
D4 "1N4148WS-7" SOD323-M 124.3,125 r180 bottom
D5 "1N4148WS-7" SOD323-M 123.2,128 r90 top
D6 "1N4148WS-7" SOD323-M 123.2,132.2 r90 top
D7 "1N4148WS-7" SOD323-M 124.301,123.1 r0 top
D8 "1N4148WS-7" SOD323-M 124.3,125 r0 top
D10 "D Zener" MF03A-M 201.657,85.39 r0 top
D11 "Blanc" LED_LNJ 232.157,85.79 r0 top
G1 "Ground Connector" GND 13.1,45.8 r0 top
J1 "9VAC Input" "CLIFF ELECTRONIC COMPONENTS_FC681465P" 117.043,130.891 r270 top locked
J2 "Pad traversant" Pad 78.8,22.7 r0 top
J3 "Double Jack" Amphenol_ACJS-MHDC 54.8,125.628 r90 top
J4 "Double Jack" Amphenol_ACJS-MHDC 38.35,125.628 r90 top
L1 "FB0805/600R/2A" IND2012X8 67.4,28 r0 top
L2 "FB0805/600R/2A" IND2012X8 78,28.7 r0 top
L3 "FB0805/600R/2A" IND2012X8 83.557,22.79 r0 top
L4 "Inductor" INDM1608X08N 283.357,25.491 r0 top
L5 "Inductor" INDM1608X08N 208.456,79.69 r0 top
L6 "Inductor" INDM1608X08N 223.556,91.39 r0 top
L7 "Inductor" INDM1608X08N 207.856,91.39 r0 top
L8 "Inductor" INDM2612X12N 216.057,86.39 r0 top
P1 "Header 8X2" CONN_1241050-8_T 40.63,61.329 r180 top
P2 "Header 3X2" CONN_1241050-3_T 34.2,107.7 r180 top
P3 "Header 2X2" CONN_1241050-2_T 131.9,95 r180 top
P4 "Header" CONN_1241050-3_T 244.2,20.5 r180 top
P5 "Header" CONN_1241050-2_T 253.9,20.4 r0 top
P6 "1734346-1" CONN4-292304 71.8,121.656 r180 top
P7 "MALE-PA16X" MALE-PAV16X-2x05 130.7,69.695 r0 top
P8 "4-1734592-0" TE_4-1734592-0 98,93.992 r180 top
P9 "MICRO_SD" "WURTH ELEKTRONIK_693072010801" 34.4,93.7 r270 top
P10 "DIN 5" "PRO SIGNAL_PSG03463" 88.7,128.7 r0 top
Q1 "OSC0/24MHz" SON440P360X120-4N 244.5,8.7 r270 top
Q2 "OSC1/32,768KHz" SON550P380X250-4N 256.3,8.8 r270 top
Q3 "NPN" SOT95P234X111-3N 369.556,10.091 r0 top
Q4 "PNP" SOT95P234X111-3N 359.256,10.091 r0 top
R1 "Res1" RESC1608X05 263.9,8.3 r270 top
R2 "Res1" RESC1608X05 260.5,13.7 r0 top
R3 "Res2" RESC1608X05 362.756,22.091 r0 top
R4 "2.2K 1%" RESC1608X05 344.156,22.091 r0 top
R5 "2.2K 1%" RESC1608X05 330.356,22.091 r0 top
R6 "Res1" RESC1608X05 361.856,39.591 r0 top
R7 "Res1" RESC1608X05 323.457,39.591 r0 top
R8 "Res1" RESC1608X05 317.957,38.691 r90 top
R9 "Res1" RESC1608X05 314.557,39.591 r0 top
R10 "Res1" RESC1608X05 308.957,38.691 r90 top
R11 "240 1%" RESC1608X05 299.457,38.691 r90 top
R12 "10K" RESC1608X05 294.757,38.691 r90 top
R13 "10K" RESC1608X05 280.757,38.691 r90 top
R14 "49.9R 1%" RESC1608X05 271.157,38.691 r90 top
R15 "10K" RESC1608X05 67.257,21.99 r90 top
R16 "Res1" RESC1608X05 373.556,10.791 r90 top
R17 "Res1" RESC1608X05 363.256,10.791 r90 top
R18 "Res1" RESC1608X05 352.756,10.791 r90 top
R19 "Res1" RESC1608X05 343.456,11.691 r0 top
R20 "Res1" RESC1608X05 348.356,3.491 r90 top
R21 "Res1" RESC1608X05 353.256,3.491 r90 top
R22 "Res1" RESC1608X05 358.156,3.491 r90 top
R23 "Res1" RESC1608X05 363.056,3.491 r90 top
R24 "Res1" RESC1608X05 367.856,3.491 r90 top
R25 "Res1" RESC1608X05 372.756,3.491 r90 top
R26 "Res1" RESC1608X05 294.256,10.791 r90 top
R27 "Res1" RESC1608X05 299.156,10.791 r90 top
R28 "Res1" RESC1608X05 303.956,10.791 r90 top
R29 "Res1" RESC1608X05 309.756,11.691 r0 top
R30 "Res1" RESC1608X05 313.356,10.791 r90 top
R31 "Res1" RESC1608X05 318.256,10.791 r90 top
R32 "Res1" RESC1608X05 323.056,10.791 r90 top
R33 "Res1" RESC1608X05 327.956,10.791 r90 top
R34 "Res1" RESC1608X05 332.856,10.791 r90 top
R35 "Res1" RESC1608X05 337.756,10.791 r90 top
R36 "Res1" RESC1608X05 271.157,3.491 r90 top
R37 "Res1" RESC1608X05 276.057,3.491 r90 top
R38 "Res1" RESC1608X05 280.957,3.491 r90 top
R39 "Res1" RESC1608X05 286.657,4.391 r0 top
R40 "Res1" RESC1608X05 290.257,3.491 r90 top
R41 "Res1" RESC1608X05 295.157,3.491 r90 top
R42 "Res1" RESC1608X05 300.057,3.491 r90 top
R43 "Res1" RESC1608X05 304.957,3.491 r90 top
R44 "Res1" RESC1608X05 309.757,3.491 r90 top
R45 "Res1" RESC1608X05 314.657,3.491 r90 top
R46 "Res1" RESC1608X05 319.557,3.491 r90 top
R47 "Res1" RESC1608X05 324.457,3.491 r90 top
R48 "Res1" RESC1608X05 329.257,3.491 r90 top
R49 "Res1" RESC1608X05 335.057,4.391 r0 top
R50 "Res1" RESC1608X05 338.657,3.491 r90 top
R51 "Res1" RESC1608X05 343.557,3.491 r90 top
R52 "Res1" RESC1608X05 301.157,24.791 r90 top
R53 "Res1" RESC1608X05 296.257,24.791 r90 top
R54 "Res1" RESC1608X05 291.357,24.791 r90 top
R55 "Res1" RESC1608X05 286.557,24.791 r90 top
R81 "Res1" RESC1608X05 218.856,73.59 r90 top
R82 "Res1" RESC1608X05 248.356,84.49 r90 top
R83 "Res1" RESC1608X05 210.157,85.99 r90 top
R84 "Res1" RESC1608X05 205.257,85.99 r90 top
R85 "Res1" RESC1608X05 240.157,72.19 r90 top
R86 "Res1" RESC1608X05 235.257,72.19 r90 top
R87 "Res1" RESC1608X05 230.357,72.19 r90 top
R88 "Res1" RESC1608X05 247.757,78.29 r90 top
R89 "Res1" RESC1608X05 248.1,90.3 r270 top
R117 "1k" RESC1608X05 294.656,15.091 r90 top
R118 "150" RESC1608X05 300.656,15.091 r90 top
R119 "100k" RESC1608X05 271.156,15.091 r90 top
S1 "SW-SPDT" C&K_TS01ABE 129.303,129.011 r0 top locked
S2 "KMR211G-LFS" C&K_KMR211G 262.3,20.6 r270 top
S3 "KMR211G-LFS" C&K_KMR211G 195.7,79.66 r90 top
U1 "SN74LVC1G07DCKR" DCK5 334.856,21.191 r0 top
U2 "AM3352BZCZD80" ZCZ324 66.2,88.7 r180 top
U3 "K4B4G1646D" BGA96C80P16X6_133X75X11 80.9,89.1 r0 top
U4 "MT29F64G08CBABAWP" TSSOP50P2000X120-48N 112.75,127.55 r0 bottom
U7 "TPD4E1U06DBVR" DBV6-M 77.022,123.05 r180 bottom
U8 "PCM3168A" PAP64_7X7P26-M 48.9,89.3 r180 bottom
U12 "TPS65217CRSLT" CRSLT 102.5,103 r0 top
VR1 "LM1117MP-5.0" MP04A 127.6,116.945 r270 bottom
VR2 "LM1117MP-5.0" MP04A 105.3,131.1 r270 bottom
VR3 "TS2940CW-3.3 RP" SOT230P715X180-4N 114.4,119.1 r180 top
VR4 "MIC5270-5.0BM5" SOT95P280X130-5N 132.4,124.9 r270 top

## Footprints (in the part's own frame and the unit in brackets; to place one, negate y for a bottom-side part, rotate by r counter-clockwise, add the part's x,y. Pads: shape width x height; smd on the part's side, far side on the other; paste and mask are expansions set on the pad)
"0805 (2012 metric)" [mil] "decouplage"
  rect 45x50 smd mask+2: 1(-35.23,-0.5) 2(34.77,-0.5)
  silkscreen extent 0,-15 0,15
Amphenol_ACJS-MHDC [mm] "Through-Hole_12"
  round 2.5 hole 1.45: 1(8.223,-5.7) 2(1.873,-5.7) 3(-4.477,-5.7) 4(8.223,5.7) 5(1.873,5.7) 6(-4.477,5.7) 7(4.972,-6.25) 8(-1.378,-6.25) 9(-7.728,-6.25) 10(4.972,6.25) 11(-1.378,6.25) 12(-7.728,6.25)
  silkscreen extent -12.38,-8 10.2,8
BGA96C80P16X6_133X75X11 [mm]
  round 0.4 smd: A1(-3.2,6) A2(-2.4,6) A3(-1.6,6) A7(1.6,6) A8(2.4,6) A9(3.2,6) B1(-3.2,5.2) B2(-2.4,5.2) B3(-1.6,5.2) B7(1.6,5.2) B8(2.4,5.2) B9(3.2,5.2) C1(-3.2,4.4) C2(-2.4,4.4) C3(-1.6,4.4) C7(1.6,4.4) C8(2.4,4.4) C9(3.2,4.4) D1(-3.2,3.6) D2(-2.4,3.6) D3(-1.6,3.6) D7(1.6,3.6) D8(2.4,3.6) D9(3.2,3.6) E1(-3.2,2.8) E2(-2.4,2.8) E3(-1.6,2.8) E7(1.6,2.8) E8(2.4,2.8) E9(3.2,2.8) F1(-3.2,2) F2(-2.4,2) F3(-1.6,2) F7(1.6,2) F8(2.4,2) F9(3.2,2) G1(-3.2,1.2) G2(-2.4,1.2) G3(-1.6,1.2) G7(1.6,1.2) G8(2.4,1.2) G9(3.2,1.2) H1(-3.2,0.4) H2(-2.4,0.4) H3(-1.6,0.4) H7(1.6,0.4) H8(2.4,0.4) H9(3.2,0.4) J1(-3.2,-0.4) J2(-2.4,-0.4) J3(-1.6,-0.4) J7(1.6,-0.4) J8(2.4,-0.4) J9(3.2,-0.4) K1(-3.2,-1.2) K2(-2.4,-1.2) K3(-1.6,-1.2) K7(1.6,-1.2) K8(2.4,-1.2) K9(3.2,-1.2) L1(-3.2,-2) L2(-2.4,-2) L3(-1.6,-2) L7(1.6,-2) L8(2.4,-2) L9(3.2,-2) M1(-3.2,-2.8) M2(-2.4,-2.8) M3(-1.6,-2.8) M7(1.6,-2.8) M8(2.4,-2.8) M9(3.2,-2.8) N1(-3.2,-3.6) N2(-2.4,-3.6) N3(-1.6,-3.6) N7(1.6,-3.6) N8(2.4,-3.6) N9(3.2,-3.6) P1(-3.2,-4.4) P2(-2.4,-4.4) P3(-1.6,-4.4) P7(1.6,-4.4) P8(2.4,-4.4) P9(3.2,-4.4) R1(-3.2,-5.2) R2(-2.4,-5.2) R3(-1.6,-5.2) R7(1.6,-5.2) R8(2.4,-5.2) R9(3.2,-5.2) T1(-3.2,-6) T2(-2.4,-6) T3(-1.6,-6) T7(1.6,-6) T8(2.4,-6) T9(3.2,-6)
  silkscreen extent -4.1,5.5 -2.6,7, body extent -3.75,-6.65 3.75,6.65, height 1.2
C&K_KMR211G [mm] "SMT_4"
  rect 2x1 smd: 1(-2.54,0.8) 2(-2.54,-0.8) 3(2.54,0.8) 4(2.54,-0.8)
  silkscreen extent -2.6,-1.78 1.65,1.83, body extent -2.07,-1.37 2.13,1.43, height 2.2
C&K_TS01ABE [mm] "Through-Hole_5"
  round 2 hole 1.1: 1(-2.54,0) 2(0,0) 3(2.54,0) ""(-2.54,5.08) ""(2.54,5.08)
  silkscreen extent -4.07,-1.17 4.06,5.59
"CAPC1005X05 (0402)" [mm] "CMS_2 ; Chip Capacitor, 2-Leads, Body 1.00x0.50mm, IPC Medium Density"
  rect 0.55x0.45 smd mask+0.02: 1(0.508,0) 2(-0.508,0)
CAPC1608X08 [mm] "CMS_2 ; Chip Capacitor, 2-Leads, Body 1.60x0.80mm, IPC Medium Density"
  rect 0.8x1 smd: 1(-0.9,0) 2(0.9,0)
  silkscreen extent -0.25,-0.55 0.25,0.55, body extent -0.8,-0.4 0.8,0.4, height 0.8
CAPC100100X102 [mm] "CMS_2 ; Aluminum Electrolytic Capacitor, Body 10.00x10.00x10.20mm, IPC Low Density"
  rect 5x1.5 smd: 1(-4.953,0) 2(4.953,0)
  silkscreen extent -5.52,-5 5,5, body extent -5,-5 5,5, height 10.2
"CLIFF ELECTRONIC COMPONENTS_FC681465P" [mm] "Through-Hole_3 ; Support Alim 9V"
  round 2.7 hole 1.6: 1(6.2,0) 2(3.1,-5) 3(0,0)
  silkscreen extent -4.25,-4.5 7.37,4.5
CONN4-292304 [mm]
  round 1.7 hole 1: 1(2.5,-1.444) 2(0,-1.444) 3(0,-3.444) 4(2.5,-3.444)
  round 0 hole 2.4 unplated: ""(-4.77,-6.154) ""(7.27,-6.154)
  silkscreen extent -4.9,-12 7.4,-0.05
CONN_1241050-2_T [mm] "Header_4"
  rect 0.8x3.2 smd paste+0: 1(1.27,-3.302) 2(1.27,3.429) 3(-1.27,-3.302) 4(-1.27,3.429)
  silkscreen extent -2.67,-3.6 2.67,2.67, body extent -2.54,-4.13 2.54,4.13, height 8.61
CONN_1241050-3_T [mm] "Header_6"
  rect 0.8x3.2 smd paste+0 mask+0.1: 1(-2.54,3.429) 2(-2.54,-3.429) 3(0,3.429) 4(0,-3.429) 5(2.54,3.429)
  rect 0.8x3.2 smd mask+0.1: 6(2.54,-3.429)
  silkscreen extent -3.9,-2.67 3.89,3.7, body extent -3.81,-4.13 3.81,4.13, height 8.61
CONN_1241050-8_T [mm] "Header_16"
  rect 0.8x3.2 smd paste+0 mask+0.1: 1(-8.89,3.429) 2(-8.89,-3.429) 3(-6.35,3.429) 4(-6.35,-3.429) 5(-3.81,3.429) 7(-1.27,3.429) 8(-1.27,-3.429) 9(1.27,3.429) 10(1.27,-3.429) 11(3.81,3.429) 13(6.35,3.429) 14(6.35,-3.429) 15(8.89,3.429) 16(8.89,-3.429)
  rect 0.8x3.2 smd mask+0.1: 6(-3.81,-3.429) 12(3.81,-3.429)
  silkscreen extent -10.25,-2.67 10.24,3.7, body extent -10.16,-4.13 10.16,4.13, height 8.61
CRSLT [mm] "QFN_48"
  rect 0.85x0.19 smd mask+0.05: 1(-2.975,2.2) 2(-2.975,1.8) 3(-2.975,1.4) 4(-2.975,1) 5(-2.975,0.6) 6(-2.975,0.2) 7(-2.975,-0.2) 8(-2.975,-0.6) 9(-2.975,-1) 10(-2.975,-1.4) 11(-2.975,-1.8) 12(-2.975,-2.2) 25(2.975,-2.2) 26(2.975,-1.8) 27(2.975,-1.4) 28(2.975,-1) 29(2.975,-0.6) 30(2.975,-0.2) 31(2.975,0.2) 32(2.975,0.6) 33(2.975,1) 34(2.975,1.4) 35(2.975,1.8) 36(2.975,2.2)
  rect 0.19x0.85 smd mask+0.05: 13(-2.2,-2.975) 14(-1.8,-2.975) 15(-1.4,-2.975) 16(-1,-2.975) 17(-0.6,-2.975) 18(-0.2,-2.975) 19(0.2,-2.975) 20(0.6,-2.975) 21(1,-2.975) 22(1.4,-2.975) 23(1.8,-2.975) 24(2.2,-2.975) 37(2.2,2.975) 38(1.8,2.975) 39(1.4,2.975) 40(1,2.975) 41(0.6,2.975) 42(0.2,2.975) 43(-0.2,2.975) 44(-0.6,2.975) 45(-1,2.975) 46(-1.4,2.975) 47(-1.8,2.975) 48(-2.2,2.975)
  rect 3.7x3.7 smd paste-5: 49(0,0)
  silkscreen extent -3.8,-3.33 3.33,3.33, body extent -3.13,-3.13 3.13,3.13, height 0.92
DBV6-M [mm] "SOT-23_6"
  rect 1.8x0.6 smd paste+0: 1(-1.422,0.95) 2(-1.422,0) 3(-1.422,-0.95) 4(1.422,-0.95) 5(1.422,0) 6(1.422,0.95)
  silkscreen extent -1.6,-1.65 1,1.77, body extent -1.5,-1.52 1.5,1.52, height 1.45
DCK5 [mm] "SC-70_5"
  rect 1.2x0.4 smd mask+0.07: 1(-1.165,0.65) 2(-1.165,0) 3(-1.165,-0.65) 4(1.165,-0.65) 5(1.165,0.65)
  silkscreen extent -1.35,-1.21 0.83,1.32, body extent -1.19,-1.08 1.19,1.08, height 1.09
GND [mm]
  rect 1x1 smd paste-3: 1(0,0)
  rect 1x1 smd paste-1: 2(0,0)
IND2012X8 [mm] "ferrite 2012"
  rect 0.8x1.2 smd mask+0.051: 1(2.2,0) 2(0,0)
  silkscreen extent 0.65,-0.5 1.55,0.5
INDM1608X08N [mm] "CMS_2 ; Molded Inductor, 2-Leads, Body 1.60x0.80mm, IPC Medium Density"
  rect 0.8x1 smd: 1(-0.9,0) 2(0.9,0)
  silkscreen extent -0.2,-0.6 0.2,0.6, body extent -0.8,-0.4 0.8,0.4, height 0.8
INDM2612X12N [mm] "CMS_2 ; Molded Inductor, 2-Leads, Body 2.60x1.25mm, IPC Medium Density"
  rect 1x1.4 smd: 1(-1.143,0) 2(1.143,0)
  silkscreen extent -0.3,-0.9 0.3,0.9, body extent -1,-0.63 1,0.62, height 1.25
LED_LNJ [mm] "CMS_2"
  rect 1.2x1.2 smd paste+0: 1(-1,0) 2(1,0)
  silkscreen extent -1.9,-0.9 -0.5,0.9, body extent -0.87,-0.47 0.88,0.48, height 0.42
MALE-PAV16X-2x05 [mm] "Header_2x20"
  rect 2.5x0.8 smd: 1(-2.7,12.065) 2(2.7,12.065) 3(-2.7,10.795) 4(2.7,10.795) 5(-2.7,9.525) 6(2.7,9.525) 7(-2.7,8.255) 8(2.7,8.255) 9(-2.7,6.985) 10(2.7,6.985) 11(-2.7,5.715) 12(2.7,5.715) 13(-2.7,4.445) 14(2.7,4.445) 15(-2.7,3.175) 16(2.7,3.175) 17(-2.7,1.905) 18(2.7,1.905) 19(-2.7,0.635) 20(2.7,0.635) 21(-2.7,-0.635) 22(2.7,-0.635) 23(-2.7,-1.905) 24(2.7,-1.905) 25(-2.7,-3.175) 26(2.7,-3.175) 27(-2.7,-4.445) 28(2.7,-4.445) 29(-2.7,-5.715) 30(2.7,-5.715) 31(-2.7,-6.985) 32(2.7,-6.985) 33(-2.7,-8.255) 34(2.7,-8.255) 35(-2.7,-9.525) 36(2.7,-9.525) 37(-2.7,-10.795) 38(2.7,-10.795) 39(-2.7,-12.065) 40(2.7,-12.065)
  silkscreen extent -2.9,-13.33 1.7,13.5
MF03A-M [mm] "SOT-23_3"
  rect 0.7x1.5 smd paste+0: 1(-0.953,-1.156) 2(0.953,-1.156) 3(0,1.156)
  silkscreen extent -2,-1.5 1.65,0.83
MP04A [mm] "SOT-223_4"
  rect 2.7x1.3 smd paste+0: 1(-3.308,2.3) 2(-3.308,0) 3(-3.308,-2.3)
  rect 2.7x4.1 smd paste+0: 4(3.345,0)
  silkscreen extent -1.97,-3.5 1.97,3.5, body extent -3.64,-3.35 3.65,3.35, height 1.81
Pad [mm]
  round 1.5 smd paste-5: 1(0,0)
PAP64_7X7P26-M [mm] "HTQFP_64"
  rect 2x0.3 smd mask+0.04: 1(-5.976,3.75) 2(-5.976,3.25) 3(-5.976,2.75) 4(-5.976,2.25) 5(-5.976,1.75) 6(-5.976,1.25) 7(-5.976,0.75) 8(-5.976,0.25) 9(-5.976,-0.25) 10(-5.976,-0.75) 11(-5.976,-1.25) 12(-5.976,-1.75) 13(-5.976,-2.25) 14(-5.976,-2.75) 15(-5.976,-3.25) 16(-5.976,-3.75) 33(5.976,-3.75) 34(5.976,-3.25) 35(5.976,-2.75) 36(5.976,-2.25) 37(5.976,-1.75) 38(5.976,-1.25) 39(5.976,-0.75) 40(5.976,-0.25) 41(5.976,0.25) 42(5.976,0.75) 43(5.976,1.25) 44(5.976,1.75) 45(5.976,2.25) 46(5.976,2.75) 47(5.976,3.25) 48(5.976,3.75)
  rect 0.32x2 smd mask+0.04: 17(-3.75,-5.976) 18(-3.25,-5.976) 19(-2.75,-5.976) 20(-2.25,-5.976) 21(-1.75,-5.976) 22(-1.25,-5.976) 23(-0.75,-5.976) 24(-0.25,-5.976) 25(0.25,-5.976) 26(0.75,-5.976) 27(1.25,-5.976) 28(1.75,-5.976) 29(2.25,-5.976) 30(2.75,-5.976) 31(3.25,-5.976) 32(3.75,-5.976) 49(3.75,5.976) 50(3.25,5.976) 51(2.75,5.976) 52(2.25,5.976) 53(1.75,5.976) 54(1.25,5.976) 55(0.75,5.976) 56(0.25,5.976) 57(-0.25,5.976) 58(-0.75,5.976) 59(-1.25,5.976) 60(-1.75,5.976) 61(-2.25,5.976) 62(-2.75,5.976) 63(-3.25,5.976) 64(-3.75,5.976)
  rect 7.26x7 smd paste-3.617 mask-3.619: 65(0,0)
  silkscreen extent -6.1,-5.23 5.23,5.23, body extent -6.1,-6.1 6.1,6.1, height 1.2
"PRO SIGNAL_PSG03463" [mm] "Through-Hole_7"
  round 2.3 hole 1.4: 1(0,-5.5) 2(7.5,-5.5) 3(-7.5,-5.5) 4(5,-8) 5(-5,-8) ""(-5,4.5) ""(5,4.5)
  silkscreen extent -10.5,-9.5 10.5,5.25
RESC1608X05 [mm] "CMS_2 ; Chip Resistor, 2-Leads, Body 1.60x0.80mm, IPC Medium Density"
  rect 1x1 smd: 1(-0.9,0) 2(0.9,0)
  silkscreen extent -0.18,-0.55 0.18,0.53, body extent -0.8,-0.4 0.8,0.4, height 0.45
SOD323-M [mm] "SOD-323F_2"
  rect 1.5x0.6 smd paste+0: 1(-1.201,0) 2(1.201,0)
  silkscreen extent -1.03,-0.83 0,0.83, body extent -1.35,-0.7 1.35,0.7, height 0.81
SON440P360X120-4N [mm] "SON, 4-Leads, Body 6.00x3.60mm, Pitch 4.40mm, IPC Medium Density"
  rect 1.4x1.8 smd: 1(-1.2,2.2) 2(-1.2,-2.2) 3(1.2,-2.2) 4(1.2,2.2)
  silkscreen extent -2.9,-3.4 2.2,3.4, body extent -1.8,-3 1.8,3, height 1.2
SON550P380X250-4N [mm] "SON, 4-Leads, Body 8.70x3.80mm, Pitch 5.50mm, IPC Medium Density"
  rect 1.6x0.7 smd: 1(-1.15,2.75) 2(-1.15,-2.75) 3(1.15,-2.75) 4(1.15,2.75)
  silkscreen extent -2.7,-4.55 2.12,4.55, body extent -1.9,-4.35 1.9,4.35, height 2.5
SOT95P234X111-3N [mm] "SOT23_3 ; SOT23, 3-Leads, Body 2.92x2.34mm, Pitch 0.95mm, IPC Medium Density"
  rect 1.5x1 smd: 1(-1.393,0.95) 2(-1.393,-0.95) 3(1.393,0)
  silkscreen extent -1.3,-1.73 0.9,2, body extent -0.7,-1.52 0.7,1.52, height 1.11
SOT95P280X130-5N [mm] "SOT23_5 ; SOT23, 5-Leads, Body 2.91x2.80mm, Pitch 0.95mm, IPC Medium Density"
  rect 1.4x0.7 smd mask+0.07: 1(-1.677,0.95) 2(-1.677,0) 3(-1.677,-0.95) 4(1.677,-0.95) 5(1.677,0.95)
  silkscreen extent -1.8,-1.73 0.85,2, body extent -0.88,-1.51 0.87,1.51, height 1.3
SOT230P715X180-4N [mm] "SOT223_4 ; SOT223, 4-Leads, Body 6.60x7.15mm (avg), Pitch 2.30mm, IPC Medium Density"
  rect 2.2x1.4 smd: 1(-3.075,2.3) 2(-3.075,0) 3(-3.075,-2.3)
  rect 2.2x3.3 smd: 4(3.075,0)
  silkscreen extent -2.95,-3.55 2.07,3.55, body extent -1.88,-3.35 1.88,3.35, height 1.8
TE_4-1734592-0 [mm] "CMS_42"
  rect 0.3x1.5 smd mask+0.05: 1(-19.5,-0.508) 2(-19,-0.508) 3(-18.5,-0.508) 4(-18,-0.508) 5(-17.5,-0.508) 6(-17,-0.508) 7(-16.5,-0.508) 8(-16,-0.508) 9(-15.5,-0.508) 10(-15,-0.508) 11(-14.5,-0.508) 12(-14,-0.508) 13(-13.5,-0.508) 14(-13,-0.508) 15(-12.5,-0.508) 16(-12,-0.508) 17(-11.5,-0.508) 18(-11,-0.508) 19(-10.5,-0.508) 20(-10,-0.508) 21(-9.5,-0.508) 22(-9,-0.508) 23(-8.5,-0.508) 24(-8,-0.508) 25(-7.5,-0.508) 26(-7,-0.508) 27(-6.5,-0.508) 28(-6,-0.508) 29(-5.5,-0.508) 30(-5,-0.508) 31(-4.5,-0.508) 32(-4,-0.508) 33(-3.5,-0.508) 34(-3,-0.508) 35(-2.5,-0.508) 36(-2,-0.508) 37(-1.5,-0.508) 38(-1,-0.508) 39(-0.5,-0.508) 40(0,-0.508)
  rect 2.5x3.2 smd: ""(-21.913,1.016) ""(2.413,1.016)
  silkscreen extent -22.86,-1.3 3.3,4.7, body extent 0,0 0.25,0.25, height 0.25
TSSOP50P2000X120-48N [mm] "TSSOP, 48-Leads, Body 12.01x18.40mm, Pitch 0.50mm, IPC Medium Density"
  rect 1.7x0.3 smd: 1(-49.55,28.75) 2(-49.55,28.25) 3(-49.55,27.75) 4(-49.55,27.25) 5(-49.55,26.75) 6(-49.55,26.25) 7(-49.55,25.75) 8(-49.55,25.25) 9(-49.55,24.75) 10(-49.55,24.25) 11(-49.55,23.75) 12(-49.55,23.25) 13(-49.55,22.75) 14(-49.55,22.25) 15(-49.55,21.75) 16(-49.55,21.25) 17(-49.55,20.75) 18(-49.55,20.25) 19(-49.55,19.75) 20(-49.55,19.25) 21(-49.55,18.75) 22(-49.55,18.25) 23(-49.55,17.75) 24(-49.55,17.25) 25(-29.25,17.25) 26(-29.25,17.75) 27(-29.25,18.25) 28(-29.25,18.75) 29(-29.25,19.25) 30(-29.25,19.75) 31(-29.25,20.25) 32(-29.25,20.75) 33(-29.25,21.25) 34(-29.25,21.75) 35(-29.25,22.25) 36(-29.25,22.75) 37(-29.25,23.25) 38(-29.25,23.75) 39(-29.25,24.25) 40(-29.25,24.75) 41(-29.25,25.25) 42(-29.25,25.75) 43(-29.25,26.25) 44(-29.25,26.75) 45(-29.25,27.25) 46(-29.25,27.75) 47(-29.25,28.25) 48(-29.25,28.75)
  silkscreen extent -49.45,16.67 -30.25,29.47, body extent -48.65,16.95 -30.15,29.05, height 1.2
"WURTH ELEKTRONIK_693072010801" [mm]
  rect 0.8x1.5 smd: 1(3.2,0) 2(2.1,0) 3(1,0) 4(-0.1,0) 5(-1.2,0) 6(-2.3,0) 7(-3.4,0) 8(-4.5,0)
  rect 1.45x2 smd: ""(-6.875,5.7) ""(-6.875,-2.6) ""(6.875,5.7) ""(6.875,-2.6)
  silkscreen extent -6.8,-4.15 6.8,9.55
ZCZ324 [mm] "BGA_324"
  round 0.45 smd paste-2 mask+0.051: A1(-6.8,6.8) A2(-6,6.8) A3(-5.2,6.8) A4(-4.4,6.8) A5(-3.6,6.8) A6(-2.8,6.8) A7(-2,6.8) A8(-1.2,6.8) A9(-0.4,6.8) A10(0.4,6.8) A11(1.2,6.8) A12(2,6.8) A13(2.8,6.8) A14(3.6,6.8) A15(4.4,6.8) A16(5.2,6.8) A17(6,6.8) A18(6.8,6.8) B1(-6.8,6) B2(-6,6) B3(-5.2,6) B4(-4.4,6) B5(-3.6,6) B6(-2.8,6) B7(-2,6) B8(-1.2,6) B9(-0.4,6) B10(0.4,6) B11(1.2,6) B12(2,6) B13(2.8,6) B14(3.6,6) B15(4.4,6) B16(5.2,6) B17(6,6) B18(6.8,6) C1(-6.8,5.2) C2(-6,5.2) C3(-5.2,5.2) C4(-4.4,5.2) C5(-3.6,5.2) C6(-2.8,5.2) C7(-2,5.2) C8(-1.2,5.2) C9(-0.4,5.2) C10(0.4,5.2) C11(1.2,5.2) C12(2,5.2) C13(2.8,5.2) C14(3.6,5.2) C15(4.4,5.2) C16(5.2,5.2) C17(6,5.2) C18(6.8,5.2) D1(-6.8,4.4) D2(-6,4.4) D3(-5.2,4.4) D4(-4.4,4.4) D5(-3.6,4.4) D6(-2.8,4.4) D7(-2,4.4) D8(-1.2,4.4) D9(-0.4,4.4) D10(0.4,4.4) D11(1.2,4.4) D12(2,4.4) D13(2.8,4.4) D14(3.6,4.4) D15(4.4,4.4) D16(5.2,4.4) D17(6,4.4) D18(6.8,4.4) E1(-6.8,3.6) E2(-6,3.6) E3(-5.2,3.6) E4(-4.4,3.6) E5(-3.6,3.6) E6(-2.8,3.6) E7(-2,3.6) E8(-1.2,3.6) E9(-0.4,3.6) E10(0.4,3.6) E11(1.2,3.6) E12(2,3.6) E13(2.8,3.6) E14(3.6,3.6) E15(4.4,3.6) E16(5.2,3.6) E17(6,3.6) E18(6.8,3.6) F1(-6.8,2.8) F2(-6,2.8) F3(-5.2,2.8) F4(-4.4,2.8) F5(-3.6,2.8) F6(-2.8,2.8) F7(-2,2.8) F8(-1.2,2.8) F9(-0.4,2.8) F10(0.4,2.8) F11(1.2,2.8) F12(2,2.8) F13(2.8,2.8) F14(3.6,2.8) F15(4.4,2.8) F16(5.2,2.8) F17(6,2.8) F18(6.8,2.8) G1(-6.8,2) G2(-6,2) G3(-5.2,2) G4(-4.4,2) G5(-3.6,2) G6(-2.8,2) G7(-2,2) G8(-1.2,2) G9(-0.4,2) G10(0.4,2) G11(1.2,2) G12(2,2) G13(2.8,2) G14(3.6,2) G15(4.4,2) G16(5.2,2) G17(6,2) G18(6.8,2) H1(-6.8,1.2) H2(-6,1.2) H3(-5.2,1.2) H4(-4.4,1.2) H5(-3.6,1.2) H6(-2.8,1.2) H7(-2,1.2) H8(-1.2,1.2) H9(-0.4,1.2) H10(0.4,1.2) H11(1.2,1.2) H12(2,1.2) H13(2.8,1.2) H14(3.6,1.2) H15(4.4,1.2) H16(5.2,1.2) H17(6,1.2) H18(6.8,1.2) J1(-6.8,0.4) J2(-6,0.4) J3(-5.2,0.4) J4(-4.4,0.4) J5(-3.6,0.4) J6(-2.8,0.4) J7(-2,0.4) J8(-1.2,0.4) J9(-0.4,0.4) J10(0.4,0.4) J11(1.2,0.4) J12(2,0.4) J13(2.8,0.4) J14(3.6,0.4) J15(4.4,0.4) J16(5.2,0.4) J17(6,0.4) J18(6.8,0.4) K1(-6.8,-0.4) K2(-6,-0.4) K3(-5.2,-0.4) K4(-4.4,-0.4) K5(-3.6,-0.4) K6(-2.8,-0.4) K7(-2,-0.4) K8(-1.2,-0.4) K9(-0.4,-0.4) K10(0.4,-0.4) K11(1.2,-0.4) K12(2,-0.4) K13(2.8,-0.4) K14(3.6,-0.4) K15(4.4,-0.4) K16(5.2,-0.4) K17(6,-0.4) K18(6.8,-0.4) L1(-6.8,-1.2) L2(-6,-1.2) L3(-5.2,-1.2) L4(-4.4,-1.2) L5(-3.6,-1.2) L6(-2.8,-1.2) L7(-2,-1.2) L8(-1.2,-1.2) L9(-0.4,-1.2) L10(0.4,-1.2) L11(1.2,-1.2) L12(2,-1.2) L13(2.8,-1.2) L14(3.6,-1.2) L15(4.4,-1.2) L16(5.2,-1.2) L17(6,-1.2) L18(6.8,-1.2) M1(-6.8,-2) M2(-6,-2) M3(-5.2,-2) M4(-4.4,-2) M5(-3.6,-2) M6(-2.8,-2) M7(-2,-2) M8(-1.2,-2) M9(-0.4,-2) M10(0.4,-2) M11(1.2,-2) M12(2,-2) M13(2.8,-2) M14(3.6,-2) M15(4.4,-2) M16(5.2,-2) M17(6,-2) M18(6.8,-2) N1(-6.8,-2.8) N2(-6,-2.8) N3(-5.2,-2.8) N4(-4.4,-2.8) N5(-3.6,-2.8) N6(-2.8,-2.8) N7(-2,-2.8) N8(-1.2,-2.8) N9(-0.4,-2.8) N10(0.4,-2.8) N11(1.2,-2.8) N12(2,-2.8) N13(2.8,-2.8) N14(3.6,-2.8) N15(4.4,-2.8) N16(5.2,-2.8) N17(6,-2.8) N18(6.8,-2.8) P1(-6.8,-3.6) P2(-6,-3.6) P3(-5.2,-3.6) P4(-4.4,-3.6) P5(-3.6,-3.6) P6(-2.8,-3.6) P7(-2,-3.6) P8(-1.2,-3.6) P9(-0.4,-3.6) P10(0.4,-3.6) P11(1.2,-3.6) P12(2,-3.6) P13(2.8,-3.6) P14(3.6,-3.6) P15(4.4,-3.6) P16(5.2,-3.6) P17(6,-3.6) P18(6.8,-3.6) R1(-6.8,-4.4) R2(-6,-4.4) R3(-5.2,-4.4) R4(-4.4,-4.4) R5(-3.6,-4.4) R6(-2.8,-4.4) R7(-2,-4.4) R8(-1.2,-4.4) R9(-0.4,-4.4) R10(0.4,-4.4) R11(1.2,-4.4) R12(2,-4.4) R13(2.8,-4.4) R14(3.6,-4.4) R15(4.4,-4.4) R16(5.2,-4.4) R17(6,-4.4) R18(6.8,-4.4) T1(-6.8,-5.2) T2(-6,-5.2) T3(-5.2,-5.2) T4(-4.4,-5.2) T5(-3.6,-5.2) T6(-2.8,-5.2) T7(-2,-5.2) T8(-1.2,-5.2) T9(-0.4,-5.2) T10(0.4,-5.2) T11(1.2,-5.2) T12(2,-5.2) T13(2.8,-5.2) T14(3.6,-5.2) T15(4.4,-5.2) T16(5.2,-5.2) T17(6,-5.2) T18(6.8,-5.2) U1(-6.8,-6) U2(-6,-6) U3(-5.2,-6) U4(-4.4,-6) U5(-3.6,-6) U6(-2.8,-6) U7(-2,-6) U8(-1.2,-6) U9(-0.4,-6) U10(0.4,-6) U11(1.2,-6) U12(2,-6) U13(2.8,-6) U14(3.6,-6) U15(4.4,-6) U16(5.2,-6) U17(6,-6) U18(6.8,-6) V1(-6.8,-6.8) V2(-6,-6.8) V3(-5.2,-6.8) V4(-4.4,-6.8) V5(-3.6,-6.8) V6(-2.8,-6.8) V7(-2,-6.8) V8(-1.2,-6.8) V9(-0.4,-6.8) V10(0.4,-6.8) V11(1.2,-6.8) V12(2,-6.8) V13(2.8,-6.8) V14(3.6,-6.8) V15(4.4,-6.8) V16(5.2,-6.8) V17(6,-6.8) V18(6.8,-6.8)
  silkscreen extent -8.8,-7.87 7.87,7.87, body extent -7.54,-7.54 7.54,7.54, height 1.4